# Altium PCB flight_controller.PcbDoc (part 1 of 2)
Units mm, origin at the board's own origin, x right, y up, seen from the top; angles counter-clockwise.
Board outline 36.5 x 36.5 mm, 4 copper layers (Top Layer, GND, Power, Bottom Layer), stack 0.568 mm thick; 81 components, 78 nets, 350 pads, 113 vias.
Unrouted connection lines stored in the file: 37.
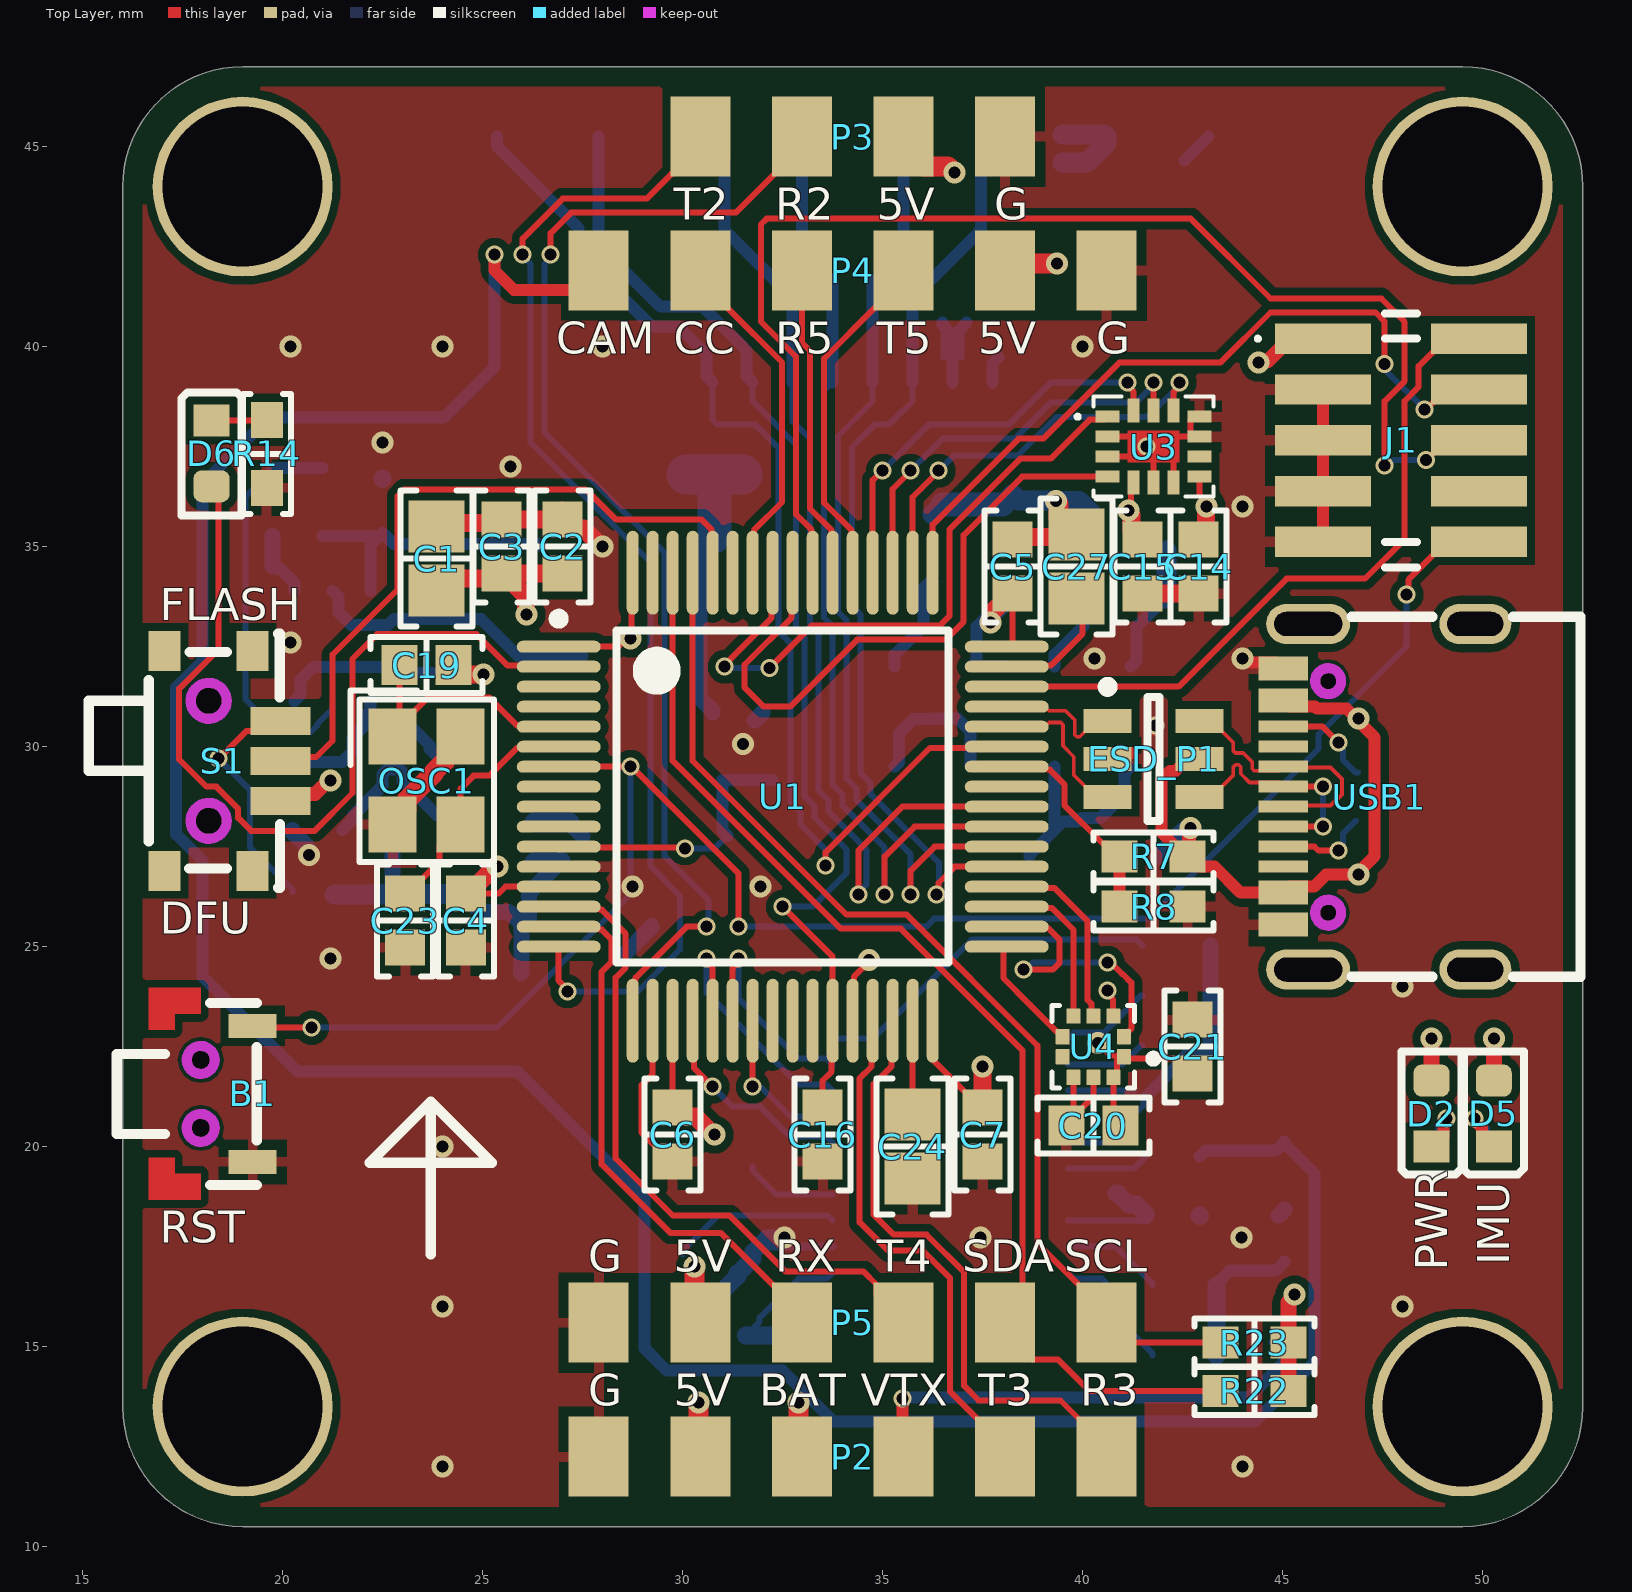
[diagram p0: Top Layer view]
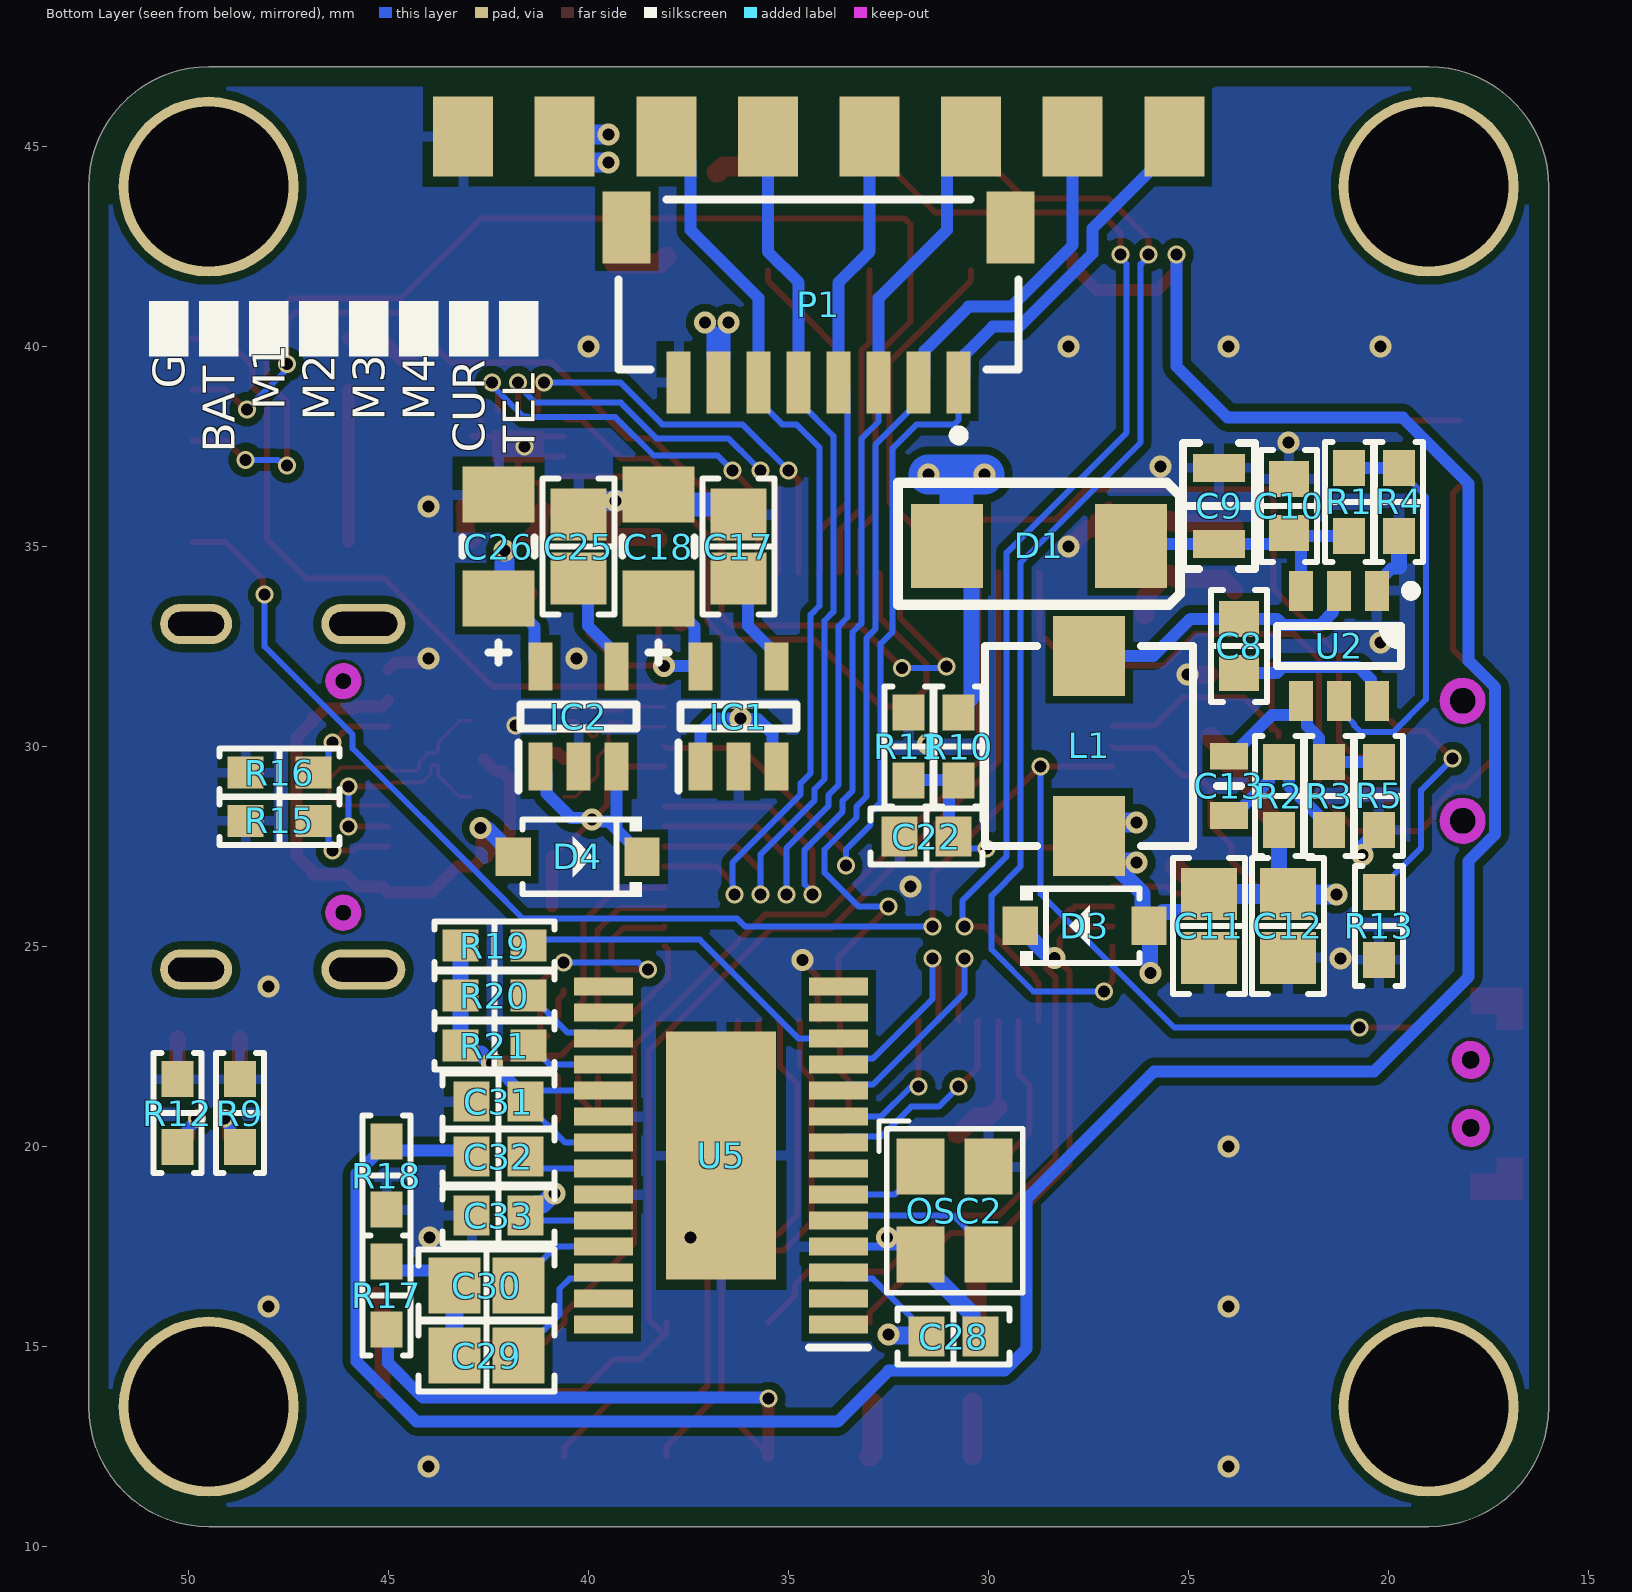
[diagram p1: Bottom Layer view, seen from below]
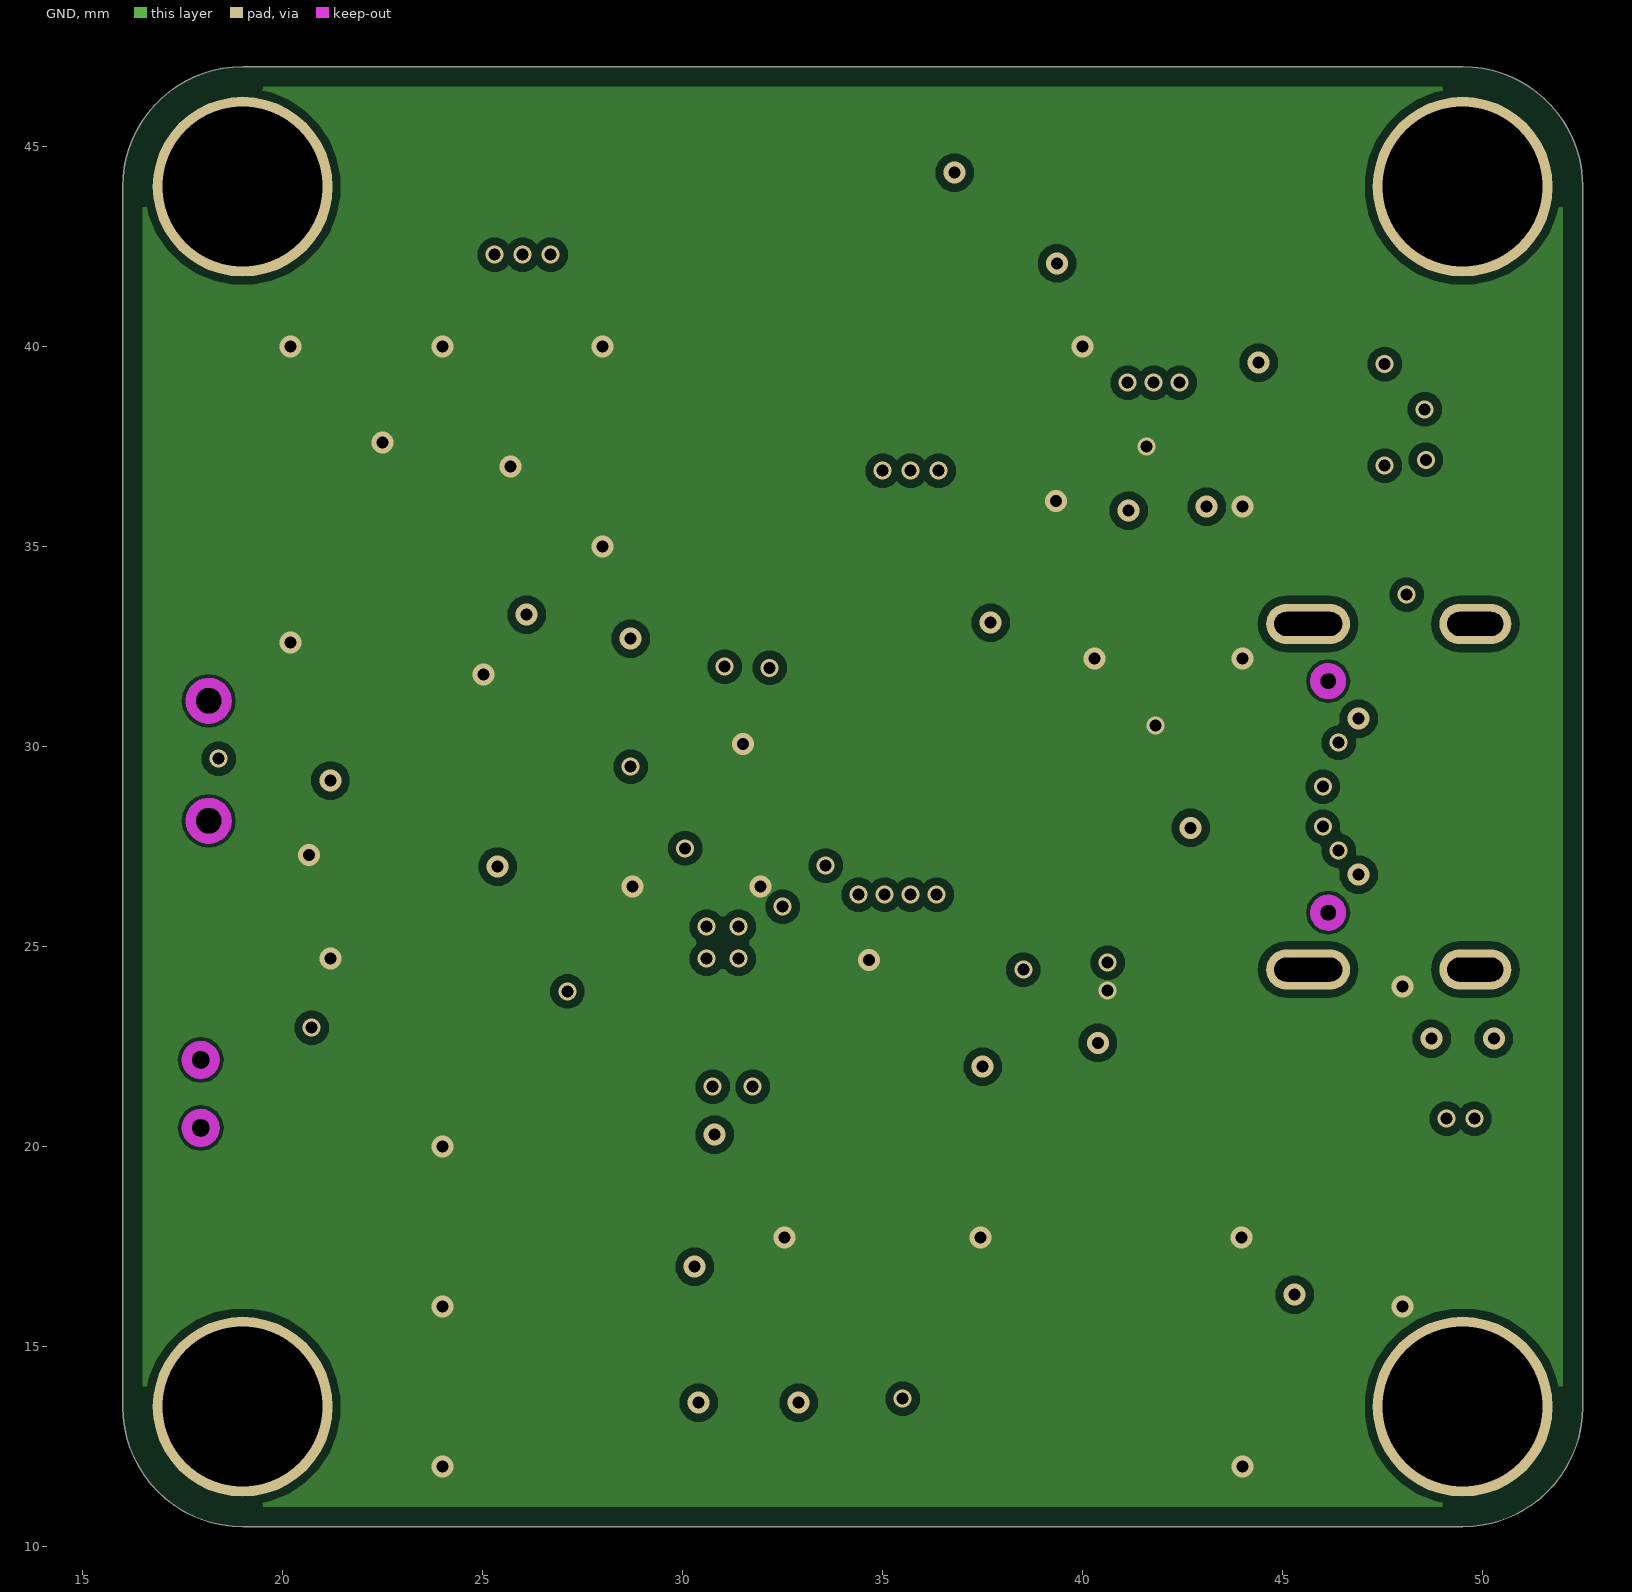
[diagram p2: GND]
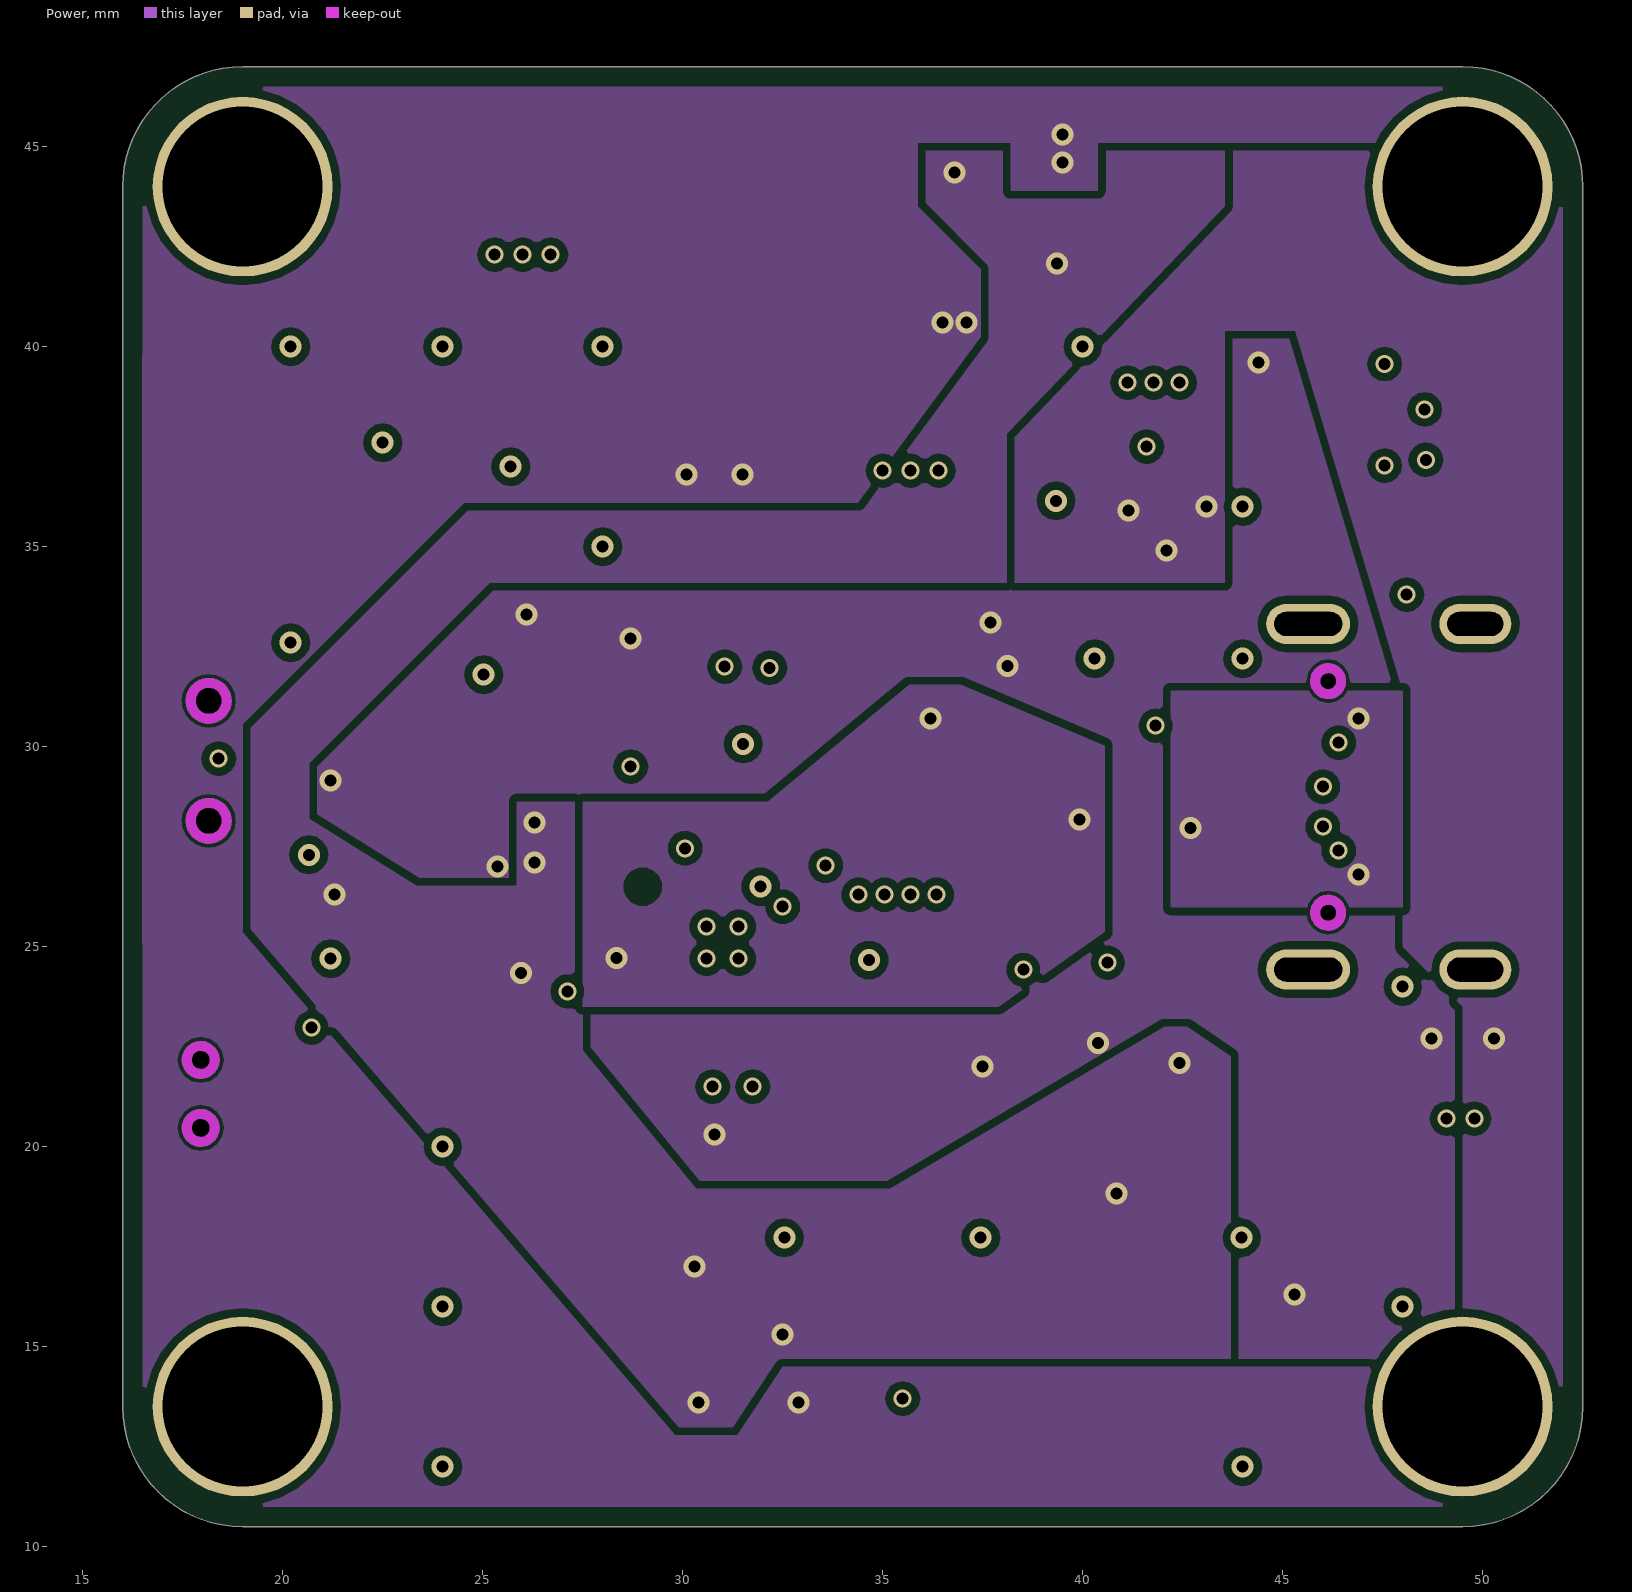
[diagram p3: Power]
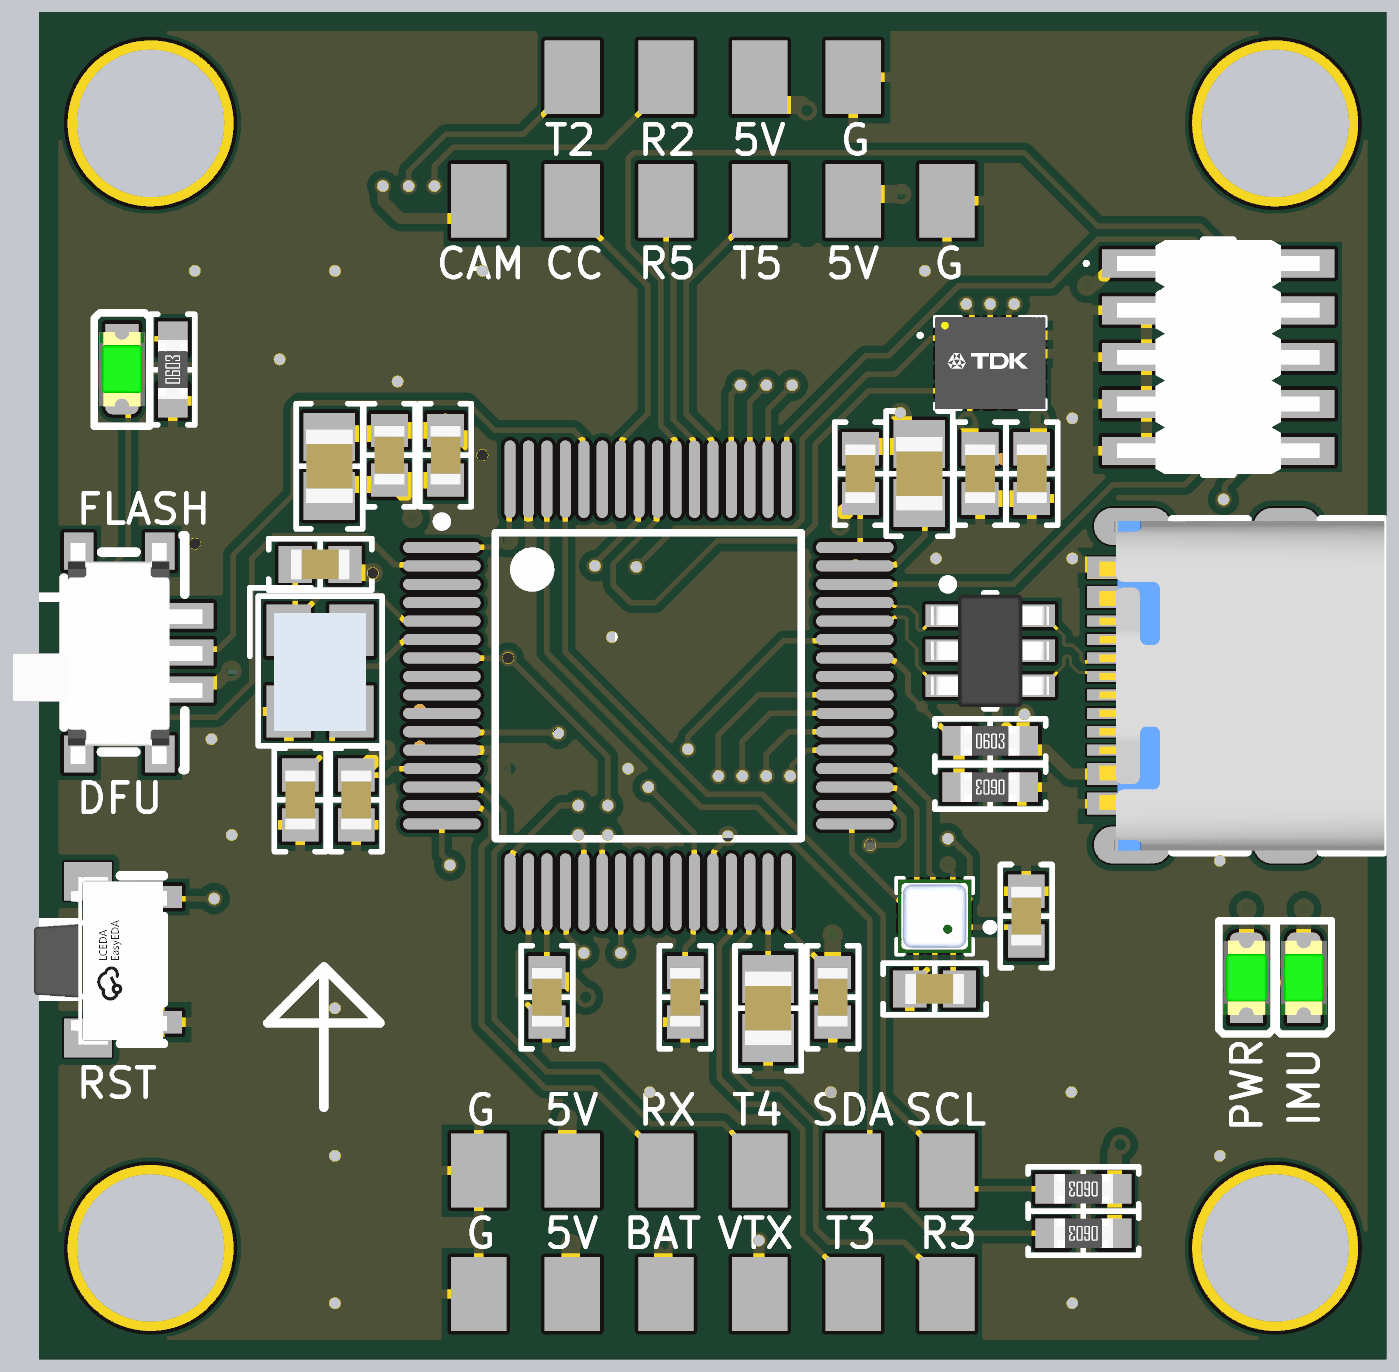
[diagram p5: 3D render of the assembled board from above, using the file's embedded part models]
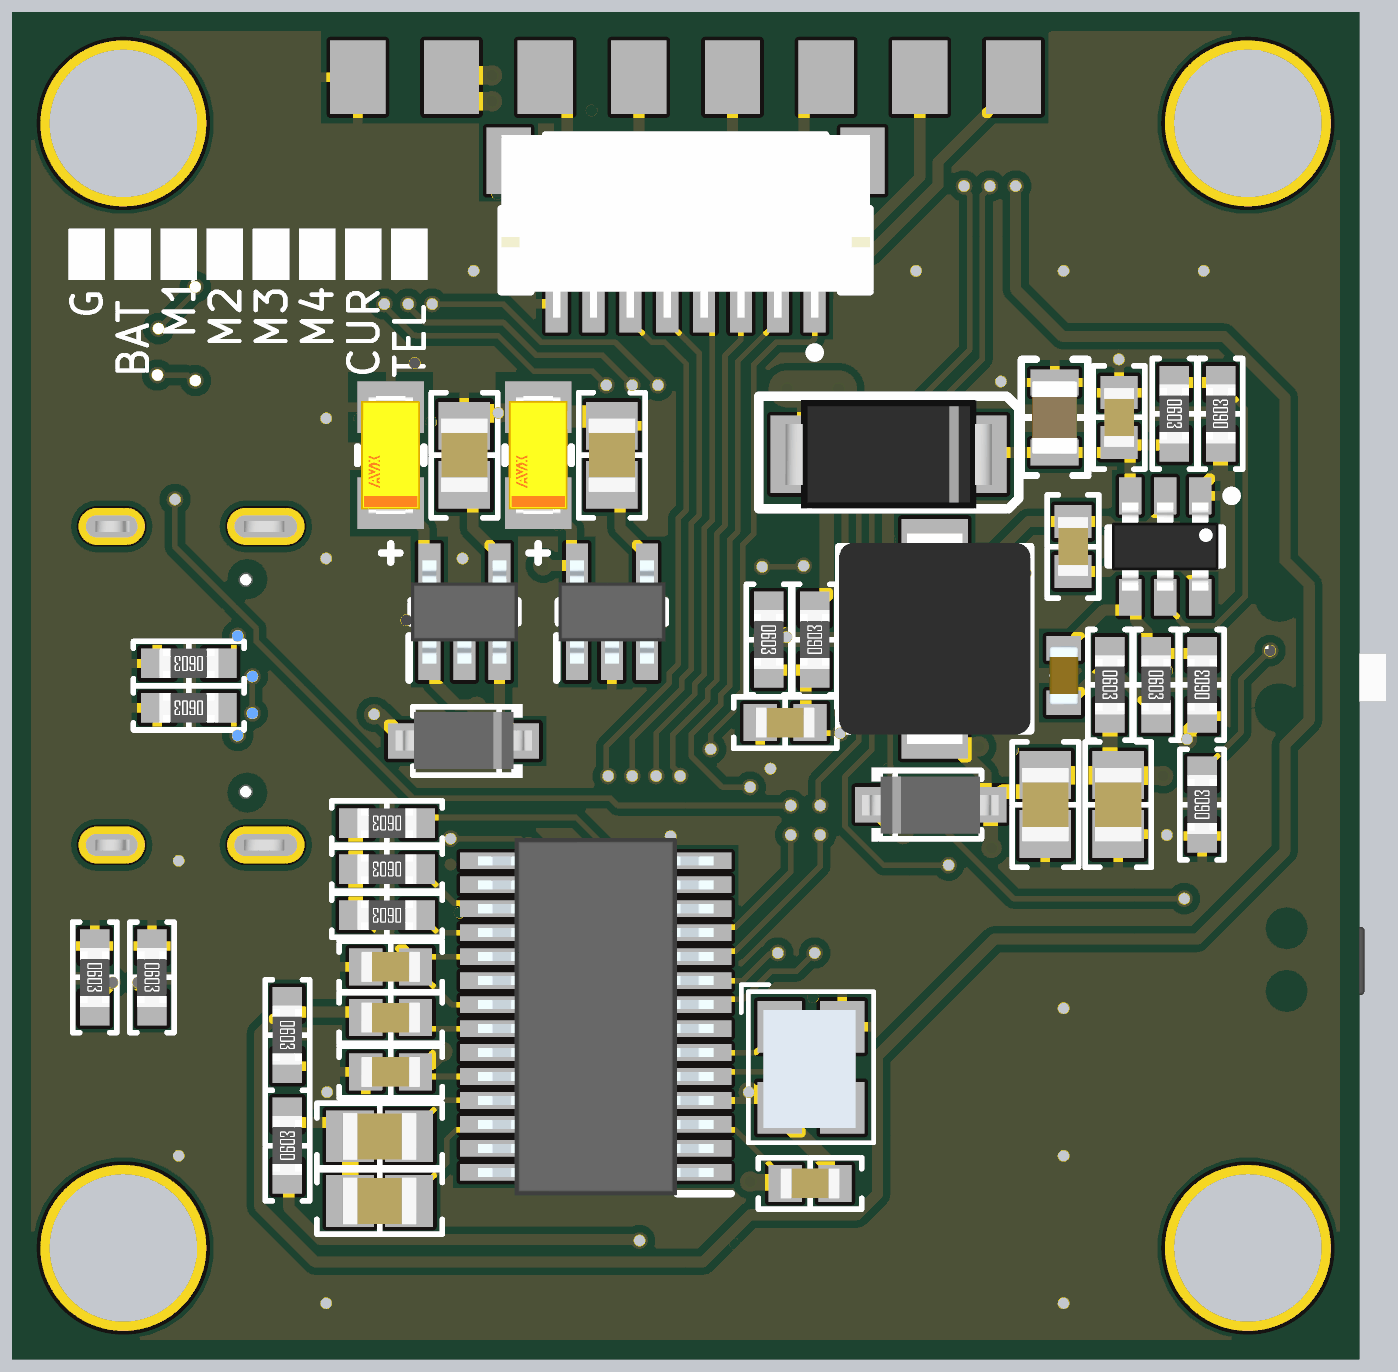
[diagram p6: 3D render of the assembled board from below, using the file's embedded part models]

## Layer stack, top to bottom
Top Solder: solder mask 0.0102, Solder Resist, Dk 3.5
Top Layer: signal copper 0.0356
Dielectric 2: prepreg 0.0711, PP-006, Dk 4.1
GND: signal copper 0.0175
Dielectric 1: prepreg 0.32, FR-4, Dk 4.8
Power: signal copper 0.0175
Dielectric 3: prepreg 0.0711, PP-006, Dk 4.1
Bottom Layer: signal copper 0.0356
Bottom Solder: solder mask 0.0102, Solder Resist, Dk 3.5

## Board outline
16,13.5 16,44 cw(c19,44) 19,47 49.5,47 cw(c49.5,44) 52.5,44 52.5,13.5 cw(c49.5,13.5) 49.5,10.5 19,10.5 cw(c19,13.5)

## Design rules (kind name [scope] priority, off if disabled: settings)
Clearance [All] p1: gap=0.2 ignorepadtopadclearanceinfootprint=TRUE
DiffPairsRouting [All] p1: maxlimit=0.3 minlimit=0.2 mostfreqgap=0.254 toplayer_prefgap=0.2 toplayer_minwidth=0.09 toplayer_maxwidth=0.3 toplayer_prefwidth=0.15 midlayer1_prefgap=0.2 midlayer1_minwidth=0.09 midlayer1_maxwidth=0.3 midlayer1_prefwidth=0.15 midlayer2_mingap=0.254 midlayer2_maxgap=0.254 midlayer2_minwidth=0.102 midlayer2_maxwidth=0.381 midlayer2_prefwidth=0.381 bottomlayer_prefgap=0.2 bottomlayer_minwidth=0.09 bottomlayer_maxwidth=0.3 bottomlayer_prefwidth=0.15 maxuncoupledlength=12.7
HoleSize [All] p1: absolutevalues=TRUE maxlimit=4 minlimit=0.025 maxpercent=80.000 minpercent=20.000
PolygonConnect [All] p1: thpad.connectstyle=Relief thpad.reliefconductorwidth=0.254 thpad.reliefentries=4 thpad.polygonreliefangle="90 Angle" thpad.airgapwidth=0.254 smdpad.connectstyle=Relief smdpad.reliefconductorwidth=0.254 smdpad.reliefentries=4 smdpad.polygonreliefangle="90 Angle" smdpad.airgapwidth=0.254 via.connectstyle=Direct via.reliefconductorwidth=0.254 via.reliefentries=4 via.polygonreliefangle="90 Angle" via.airgapwidth=0.254
RoutingVias [All] p1: holewidth=0.711 width=1.27 viastyle="Through Hole" minholewidth=0.2 minwidth=0.35 maxholewidth=0.711 maxwidth=1.27
SMDNeckDown [All] p1: percent=50.000
SolderMaskExpansion [All] p1: expansion=0.102 istentingtop=FALSE
SupplyNets "Schematic Supply Nets_6" [InNet('+5V')] p1: voltage=0.000
SupplyNets "Schematic Supply Nets_5" [InNet('+3V3')] p2: voltage=0.000
SupplyNets "Schematic Supply Nets_4" [InNet('+3V3_IMU')] p3: voltage=0.000
SupplyNets "Schematic Supply Nets_3" [InNet('+5V_USB')] p4: voltage=0.000
SupplyNets "Schematic Supply Nets_2" [InNet('+VBAT')] p5: voltage=0.000
SupplyNets "Schematic Supply Nets_1" [InNet('+5V_Reg')] p6: voltage=0.000
SupplyNets "Schematic Supply Nets" [InNet('GND')] p7: voltage=0.000
UnRoutedNet [All] p1: checkbadconnections=TRUE
Width [All] p1: maxlimit=1 minlimit=0.09 preferedwidth=0.254 toplayer_prefwidth=0.15 midlayer1_prefwidth=0.15 midlayer2_minwidth=0.102 midlayer2_maxwidth=0.254 bottomlayer_prefwidth=0.15 minimp=50.000000 maximp=50.000000 favimp=50.000000
27 further rules are at their usual default settings.

## Classes and differential pairs
differential pair USB_D: +USB_D_P -USB_D_N
differential pair USB_CON_D: +USB_CON_D_P -USB_CON_D_N

## Components (designator, comment, footprint, x,y, rotation, side; value= is the part's Value field where it differs from the comment)
B1 "Button" TS24CA 19.84,18.518 r90 top locked
C1 "4.7 µF" "CAP 0805_2012" 23.85,34.7 r270 top locked
C2 "0.1 µF" "CAP 0603_1608" 27,35 r270 top locked
C3 "0.1 µF" "CAP 0603_1608" 25.475,35 r270 top locked
C4 "0.1 µF" "CAP 0603_1608" 24.578,25.65 r90 top locked
C5 "0.1 µF" "CAP 0603_1608" 38.25,34.5 r270 top
C6 "0.1 µF" "CAP 0603_1608" 29.75,20.3 r90 top locked
C7 "0.1 µF" "CAP 0603_1608" 37.5,20.3 r90 top locked
C8 "0.1 µF" "CAP 0603_1608" 23.743,32.524 r90 bottom locked
C9 "10 µF" "MURATA GRM21B 0805_2012" 24.243,36.024 r270 bottom locked
C10 "0.1 µF" "CAP 0603_1608" 22.493,36.024 r90 bottom locked
C11 "22 µF" "CAP 0805_2012" 24.493,25.524 r90 bottom locked
C12 "22 µF" "CAP 0805_2012" 22.518,25.524 r90 bottom locked
C13 "75p" CAPC1608X90N 23.993,29.024 r270 bottom
C14 "0.1 µF" "CAP 0603_1608" 42.9,34.5 r270 top locked
C15 "0.1 µF" "CAP 0603_1608" 41.5,34.5 r270 top locked
C16 "0.1 µF" "CAP 0603_1608" 33.5,20.3 r90 top locked
C17 "10 µF" "CAP 0805_2012" 36.25,35 r270 bottom locked value="470 pF"
C18 "2.2uF" FP-TAJA-MFG 38.25,35 r270 bottom locked
C19 "0.1 µF" "CAP 0603_1608" 23.6,32.04 r180 top locked
C20 "0.1 µF" "CAP 0603_1608" 40.265,20.525 r180 top locked
C21 "0.1 µF" "CAP 0603_1608" 42.75,22.5 r90 top locked
C22 "0.1 µF" "CAP 0603_1608" 31.55,27.75 r180 bottom locked
C23 "0.1 µF" "CAP 0603_1608" 23.06,25.65 r90 top locked
C24 "2.2 µF" "CAP 0805_2012" 35.75,20 r90 top locked
C25 "10 µF" "CAP 0805_2012" 40.25,35 r270 bottom locked value="470 pF"
C26 "2.2uF" FP-TAJA-MFG 42.25,35 r270 bottom locked
C27 "2.2 µF" "CAP 0805_2012" 39.85,34.5 r270 top locked
C28 "0.1 µF" "CAP 0603_1608" 30.875,15.25 r0 bottom locked
C29 "22 µF" "CAP 0805_2012" 42.55,14.775 r180 bottom locked
C30 "22 µF" "CAP 0805_2012" 42.55,16.525 r180 bottom locked
C31 "0.1 µF" "CAP 0603_1608" 42.25,21.125 r0 bottom locked
C32 "0.1 µF" "CAP 0603_1608" 42.25,19.75 r0 bottom locked
C33 "0.1 µF" "CAP 0603_1608" 42.25,18.275 r0 bottom locked
D1 "SS34" FP_SMA 28.743,35.024 r180 bottom locked
D2 "LED" FP_0805_LED_GREEN 48.723,20.828 r270 top locked
D3 "B5819W_C7420330" SOD-123 25.147,26.476 r0 bottom locked
D4 "B5819W_C7420330" SOD-123 42.732,26.298 r180 bottom locked
D5 "LED" FP_0805_LED_GREEN 50.277,20.828 r270 top
D6 "LED" FP_0805_LED_GREEN 18.223,37.336 r90 top locked
ESD_P1 "USBLC6-2SC6" STM-SOT23-6L_V 41.773,29.698 r0 top
IC1 "MIC5219-3.3YM5-TR" SOT95P280X145-5N 36.25,30.75 r90 bottom locked
IC2 "MIC5219-3.3YM5-TR" SOT95P280X145-5N 40.25,30.75 r90 bottom locked
J1 "20021121-00010C4LF" 2002112100010C4LF 47.958,37.66 r270 top locked
L1 "10µ" "BOURNS SRP5030T" 27.493,30.024 r270 bottom locked value="10 µH"
OSC1 "8MHz" CRYSTAL-SMD_4P-L3.2-W2.5-BL 21.439,31.915 r270 top locked
OSC2 "27MHz" X322527MSB4SI 30,19.5 r270 bottom locked
P1 "SM08B-SRSS-TB(LF)(SN)" JST-SM08B-SRSS-TB_V 34.25,41.56 r0 bottom locked
P2 "Connector" PAD_6 41.489,10.421 r90 top locked
P3 "Connector" PAD_4 29.449,46.858 r270 top locked
P4 "Connector" PAD_6 27.011,43.729 r270 top locked
P5 "Connector" PAD_6 41.489,13.771 r90 top locked
R1 "511k" "YAGEO RES 0603_1608" 20.993,36.124 r270 bottom locked
R2 "49R9" "YAGEO RES 0603_1608" 22.743,28.774 r270 bottom
R3 "100k" "YAGEO RES 0603_1608" 21.493,28.774 r270 bottom locked
R4 "105k" "YAGEO RES 0603_1608" 19.743,36.124 r90 bottom locked
R5 "13k3" "YAGEO RES 0603_1608" 20.243,28.774 r90 bottom locked
R7 "33k" "YAGEO RES 0603_1608" 41.773,27.25 r0 top locked
R8 "82k" "YAGEO RES 0603_1608" 41.773,26 r180 top locked
R9 "1k" "YAGEO RES 0603_1608" 48.723,20.84 r270 bottom
R10 "33k" "YAGEO RES 0603_1608" 30.75,30 r90 bottom locked value=100k
R11 "6.8k" "YAGEO RES 0603_1608" 32,30 r270 bottom locked value=10k
R12 "1k" "YAGEO RES 0603_1608" 50.277,20.84 r270 bottom
R13 "6.8k" "YAGEO RES 0603_1608" 20.243,25.524 r90 bottom locked value=10k
R14 "1k" "YAGEO RES 0603_1608" 19.602,37.324 r90 top
R15 "5k1" "YAGEO RES 0603_1608" 47.726,28.148 r0 bottom locked
R16 "5k1" "YAGEO RES 0603_1608" 47.726,29.352 r0 bottom locked
R17 "75R" "YAGEO RES 0603_1608" 45.05,16.275 r90 bottom locked
R18 "75R" "YAGEO RES 0603_1608" 45.05,19.275 r270 bottom locked
R19 "1k" "YAGEO RES 0603_1608" 42.35,25.025 r0 bottom locked
R20 "1k" "YAGEO RES 0603_1608" 42.35,23.775 r0 bottom locked
R21 "1k" "YAGEO RES 0603_1608" 42.35,22.525 r0 bottom locked
R22 "5k1" "YAGEO RES 0603_1608" 44.3,13.898 r180 top locked
R23 "5k1" "YAGEO RES 0603_1608" 44.3,15.102 r180 top locked
S1 "MINI MSK12CO2" SW-SMD_MSK12CO2 14.896,33.152 r270 top locked
U1 "STM32F405RGT6" STM-LQFP64_M 32.5,28.75 r0 top locked
U2 "TPS54302DDCT" "TI SOT-23-6 DDC" 21.243,32.524 r270 bottom locked
U3 "ICM-42688-P" IIM42352 41.773,37.5 r0 top locked
U4 "BMP388" PQFN50P200X200X80-10N 41.408,23.643 r180 top locked
U5 "AT7456E" SOP65P640X120-29N 36.688,19.775 r0 bottom locked
USB1 "GT-USB-7010ASV" USB-C-SMD_G-SWITCH_GT-USB-7010ASV 45.636,24.43 r90 top locked

## Footprints (in the part's own frame and the unit in brackets; to place one, negate y for a bottom-side part, rotate by r counter-clockwise, add the part's x,y. Pads: shape width x height; smd on the part's side, far side on the other; paste and mask are expansions set on the pad)
2002112100010C4LF [mm]
  rect 0.76x2.4 smd: 1(-2.54,-1.95) 2(-2.54,1.95) 3(-1.27,-1.95) 4(-1.27,1.95) 5(0,-1.95) 6(0,1.95) 7(1.27,-1.95) 8(1.27,1.95) 9(2.54,-1.95) 10(2.54,1.95)
  silkscreen extent -3.17,-3.63 3.17,0.4, body extent -3.18,-2.75 3.18,2.75, height 4.5
"BOURNS SRP5030T" [mm] "Precision Wire Wound Inductor, 2-Leads, Body 5.70x5.20mm, IPC Medium Density"
  rect 2x1.8 smd: 1(-2.25,0) 2(2.25,0)
  silkscreen extent -2.5,-2.6 2.5,2.6, body extent -2.85,-2.6 2.85,2.6, height 3
"CAP 0603_1608" [mm] "Chip Capacitor, 2-Leads, Body 1.60x0.80mm, IPC Medium Density"
  rect 0.9x1 smd: 1(-0.675,0) 2(0.675,0)
  silkscreen extent -1.4,-0.7 1.4,0.7, body extent -0.8,-0.41 0.8,0.41, height 0.82
"CAP 0805_2012" [mm] "Chip Capacitor, 2-Leads, Body 2.00x1.20mm, IPC Medium Density"
  rect 1.3x1.4 smd: 1(-0.8,0) 2(0.8,0)
  silkscreen extent -1.7,-0.9 1.7,0.9, body extent -1,-0.64 1,0.64, height 1.26
CAPC1608X90N [mm]
  rect 0.67x0.94 smd: 1(-0.74,0) 2(0.74,0)
  silkscreen extent 0,-0.3 0,0.3, body extent -0.8,-0.4 0.8,0.4, height 0.9
CRYSTAL-SMD_4P-L3.2-W2.5-BL [mm]
  rect 1.4x1.2 smd: 1(1.665,1.311) 2(3.865,1.311) 3(3.865,3.011) 4(1.665,3.011)
  silkscreen extent 0.51,0.25 4.79,3.84, body extent 1.19,0.91 4.39,3.41, height 0.79
FP-TAJA-MFG [mm]
  rect 1.4x1.8 smd paste+0 mask+0: 1(-1.3,0) 2(1.3,0)
  silkscreen extent -0.22,-0.9 2.9,0.9, body extent -1.6,-0.8 1.6,0.8, height 1.8
FP_0805_LED_GREEN [mm] "0805 méretű zöld LED"
  rrect50% 0.8x0.9 smd: A(-0.825,0)
  rect 0.8x0.9 smd: K(0.825,0)
  silkscreen extent -1.55,-0.75 1.52,0.75, body extent -1.01,-0.63 1.01,0.63, height 1.1
FP_SMA [mm] "SMA footprint"
  rect 1.8x2.1 smd: 1(-2.3,0) 2(2.3,0)
  silkscreen extent -3.53,-1.47 3.53,1.58, body extent -2.8,-1.47 2.8,1.48, height 2.7
IIM42352 [mm]
  rect 0.6x0.3 smd: 1(-1.15,0.75) 2(-1.15,0.25) 3(-1.15,-0.25) 4(-1.15,-0.75) 8(1.15,-0.75) 9(1.15,-0.25) 10(1.15,0.25) 11(1.15,0.75)
  rect 0.3x0.6 smd: 5(-0.5,-0.9) 6(0,-0.9) 7(0.5,-0.9) 12(0.5,0.9) 13(0,0.9) 14(-0.5,0.9)
  silkscreen extent -1.95,-1.25 1.5,1.25, body extent -1.5,-1.25 1.5,1.25, height 0.9
JST-SM08B-SRSS-TB_V [mm] "SMD, 8-Leads, Body 10x4.25mm, Pitch 1mm"
  rect 0.6x1.55 smd: 1(-3.5,2.45) 2(-2.5,2.45) 3(-1.5,2.45) 4(-0.5,2.45) 5(0.5,2.45) 6(1.5,2.45) 7(2.5,2.45) 8(3.5,2.45)
  rect 1.2x1.8 smd: MP1(-4.8,-1.425) MP2(4.8,-1.425)
  silkscreen extent -5,-2.12 5,3.9, body extent -5,-2.12 5,2.83, height 2.96
"MURATA GRM21B 0805_2012" [mm] "Chip Capacitor, 2-Leads, Body 2.00x1.25mm"
  rect 0.7x1.3 smd: 1(-0.95,0) 2(0.95,0)
  silkscreen extent -1.58,-0.9 1.58,0.9, body extent -1,-0.63 1,0.63, height 1.25
PAD_4 [mm]
  rect 2x1.5 smd: 1(1.608,0.991) 2(1.608,3.531) 3(1.608,6.071) 4(1.608,8.611)
PAD_6 [mm]
  rect 2x1.5 smd: 1(1.829,0.889) 2(1.829,3.429) 3(1.829,5.969) 4(1.829,8.509) 5(1.829,11.049) 6(1.829,13.589)
PQFN50P200X200X80-10N [mm]
  rrect9% 0.35x0.38 smd: 1(0.378,1.393) 2(0.378,0.893) 3(0.643,0.378) 4(1.143,0.378) 5(1.643,0.378) 6(1.908,0.893) 7(1.908,1.393) 8(1.643,1.908) 9(1.143,1.908) 10(0.643,1.908)
  silkscreen extent -0.46,0.11 2.17,2.17, body extent 0.14,0.14 2.14,2.14, height 0.8
SOD-123 [mm]
  rect 0.88x0.96 smd: 1(0.846,0.952) 2(4.067,0.952)
  silkscreen extent 1.08,-0.05 4.06,1.95, body extent 0.61,0.19 4.31,1.74, height 1.2
SOP65P640X120-29N [mm]
  rect 1.475x0.45 smd: 1(-2.938,4.225) 2(-2.938,3.575) 3(-2.938,2.925) 4(-2.938,2.275) 5(-2.938,1.625) 6(-2.938,0.975) 7(-2.938,0.325) 8(-2.938,-0.325) 9(-2.938,-0.975) 10(-2.938,-1.625) 11(-2.938,-2.275) 12(-2.938,-2.925) 13(-2.938,-3.575) 14(-2.938,-4.225) 15(2.938,-4.225) 16(2.938,-3.575) 17(2.938,-2.925) 18(2.938,-2.275) 19(2.938,-1.625) 20(2.938,-0.975) 21(2.938,-0.325) 22(2.938,0.325) 23(2.938,0.975) 24(2.938,1.625) 25(2.938,2.275) 26(2.938,2.925) 27(2.938,3.575) 28(2.938,4.225)
  rect 2.75x6.2 smd: 29(0,0)
  silkscreen extent -3.68,4.8 -2.2,4.8, body extent -3.2,-4.85 3.2,4.85, height 1.2
SOT95P280X145-5N [mm]
  rect 1.2x0.6 smd: 1(-1.25,0.95) 2(-1.25,0) 3(-1.25,-0.95) 4(1.25,-0.95) 5(1.25,0.95)
  silkscreen extent -1.85,-1.45 0.3,1.5, body extent -1.4,-1.45 1.4,1.45, height 1.45
STM-LQFP64_M [mm] "Thin QFP, 64-Leads, Body 10x10mm, Pitch 0.5mm, IPC Low Density"
  oval 2.1x0.3 smd: 1(-5.6,3.75) 2(-5.6,3.25) 3(-5.6,2.75) 4(-5.6,2.25) 5(-5.6,1.75) 6(-5.6,1.25) 7(-5.6,0.75) 8(-5.6,0.25) 9(-5.6,-0.25) 10(-5.6,-0.75) 11(-5.6,-1.25) 12(-5.6,-1.75) 13(-5.6,-2.25) 14(-5.6,-2.75) 15(-5.6,-3.25) 16(-5.6,-3.75) 33(5.6,-3.75) 34(5.6,-3.25) 35(5.6,-2.75) 36(5.6,-2.25) 37(5.6,-1.75) 38(5.6,-1.25) 39(5.6,-0.75) 40(5.6,-0.25) 41(5.6,0.25) 42(5.6,0.75) 43(5.6,1.25) 44(5.6,1.75) 45(5.6,2.25) 46(5.6,2.75) 47(5.6,3.25) 48(5.6,3.75)
  oval 0.3x2.1 smd: 17(-3.75,-5.6) 18(-3.25,-5.6) 19(-2.75,-5.6) 20(-2.25,-5.6) 21(-1.75,-5.6) 22(-1.25,-5.6) 23(-0.75,-5.6) 24(-0.25,-5.6) 25(0.25,-5.6) 26(0.75,-5.6) 27(1.25,-5.6) 28(1.75,-5.6) 29(2.25,-5.6) 30(2.75,-5.6) 31(3.25,-5.6) 32(3.75,-5.6) 49(3.75,5.6) 50(3.25,5.6) 51(2.75,5.6) 52(2.25,5.6) 53(1.75,5.6) 54(1.25,5.6) 55(0.75,5.6) 56(0.25,5.6) 57(-0.25,5.6) 58(-0.75,5.6) 59(-1.25,5.6) 60(-1.75,5.6) 61(-2.25,5.6) 62(-2.75,5.6) 63(-3.25,5.6) 64(-3.75,5.6)
  silkscreen extent -5.72,-4.15 4.15,4.57, body extent -5,-5 5,5, height 1.6
STM-SOT23-6L_V [mm] "SOT23, 6-Leads, Body 3.05x1.75mm, Pitch 0.95mm"
  rect 1.2x0.6 smd: 1(-1.15,0.95) 2(-1.15,0) 3(-1.15,-0.95) 4(1.15,-0.95) 5(1.15,0) 6(1.15,0.95)
  silkscreen extent -1.27,-1.55 0.15,1.92, body extent -1.6,-1.53 1.6,1.53, height 1.45
SW-SMD_MSK12CO2 [mm]
  rect 0.7x1.5 smd: 1(2.504,5.054) 2(3.504,5.054) 3(4.504,5.054)
  rect 1x0.8 smd: 4(0.754,4.354) 4(0.754,2.154) 5(6.254,2.154) 5(6.254,4.354)
  Keep-Out Layer board cut-out: 5.454,3.254 5.392,3.477 5.228,3.64 5.004,3.699 4.781,3.64 4.616,3.477 4.554,3.254 4.554,3.254 4.616,3.031 4.781,2.868 5.004,2.809 5.228,2.868 5.392,3.031 5.454,3.254
  Keep-Out Layer board cut-out: 2.454,3.254 2.392,3.477 2.228,3.64 2.004,3.699 1.781,3.64 1.616,3.477 1.554,3.254 1.554,3.254 1.616,3.031 1.781,2.868 2.004,2.809 2.228,2.868 2.392,3.031 2.454,3.254
  Keep-Out Layer circle w0.254: c5.004,3.254 r0.45
  Keep-Out Layer circle w0.025: c5.004,3.254 r0.45
  Keep-Out Layer circle w0.254: c2.004,3.254 r0.45
  Keep-Out Layer circle w0.025: c2.004,3.254 r0.45
  silkscreen extent 0.33,0.25 6.68,5.03, body extent 0.53,0.36 6.53,5.51, height 1.4
"TI SOT-23-6 DDC" [mm] "SOT23, 6-Leads, Body 2.90x2.80mm, Pitch 0.95mm, IPC Medium Density"
  rect 1x0.6 smd: 1(-1.375,0.95) 2(-1.375,0) 3(-1.375,-0.95) 4(1.375,-0.95) 5(1.375,0) 6(1.375,0.95)
  silkscreen extent -1.5,-1.55 0.5,1.92, body extent -1.19,-1.45 1.19,1.45, height 1
TS24CA [mm]
  rect 0.6x1.2 smd: 1(1.103,0.59) 2(4.503,0.59)
  Top Layer region: 5.453,1.89 4.803,1.89 4.803,2.54 4.403,2.54 4.403,3.19 5.453,3.19
  Top Layer region: 1.203,2.54 0.803,2.54 0.803,1.89 0.153,1.89 0.153,3.19 1.203,3.19
  Keep-Out Layer board cut-out: 2.303,1.89 2.254,2.063 2.126,2.19 1.953,2.236 1.779,2.19 1.651,2.063 1.603,1.89 1.603,1.89 1.651,1.717 1.779,1.59 1.953,1.544 2.126,1.59 2.254,1.717 2.303,1.89
  Keep-Out Layer board cut-out: 4.003,1.89 3.954,2.063 3.826,2.19 3.653,2.236 3.479,2.19 3.351,2.063 3.303,1.89 3.303,1.89 3.351,1.717 3.479,1.59 3.653,1.544 3.826,1.59 3.954,1.717 4.003,1.89
  Keep-Out Layer circle w0.025: c1.953,1.89 r0.35
  Keep-Out Layer circle w0.254: c1.953,1.89 r0.35
  Keep-Out Layer circle w0.025: c3.653,1.89 r0.35
  Keep-Out Layer circle w0.254: c3.653,1.89 r0.35
  silkscreen extent 0.53,0.49 5.08,3.99, body extent 0.49,0.4 5.04,4, height 1.87
USB-C-SMD_G-SWITCH_GT-USB-7010ASV [mm]
  oval 1x2.1 hole 0.6 slot 1.7 at 90 deg paste-2539.97 mask+0.05: 1(0,0) 2(8.64,0)
  oval 1x1.8 hole 0.6 slot 1.4 at 90 deg paste-2539.97 mask+0.05: 3(8.64,-4.18) 4(0,-4.18)
  rect 0.6x1.24 smd paste-100 mask+0.05: A1B12(1.12,0.62) A4B9(1.92,0.62) B1A12(7.52,0.62) B4A9(6.72,0.62)
  rect 0.3x1.24 smd paste-100 mask+0.05: A5(3.07,0.62) A6(4.07,0.62) A7(4.57,0.62) A8(5.57,0.62) B5(6.07,0.62) B6(5.07,0.62) B7(3.57,0.62) B8(2.57,0.62)
  Keep-Out Layer board cut-out: 1.745,-0.5 1.701,-0.338 1.582,-0.22 1.42,-0.177 1.258,-0.22 1.139,-0.338 1.095,-0.5 1.095,-0.5 1.139,-0.662 1.258,-0.78 1.42,-0.823 1.582,-0.78 1.701,-0.662 1.745,-0.5
  Keep-Out Layer board cut-out: 7.535,-0.5 7.491,-0.338 7.372,-0.22 7.21,-0.177 7.048,-0.22 6.929,-0.338 6.885,-0.5 6.885,-0.5 6.929,-0.662 7.048,-0.78 7.21,-0.823 7.372,-0.78 7.491,-0.662 7.535,-0.5
  Keep-Out Layer circle w0.254: c1.42,-0.5 r0.325
  Keep-Out Layer circle w0.025: c1.42,-0.5 r0.325
  Keep-Out Layer circle w0.254: c7.21,-0.5 r0.325
  Keep-Out Layer circle w0.025: c7.21,-0.5 r0.325
  silkscreen extent -0.18,-6.81 8.82,-1.09, body extent -0.15,-6.82 8.79,0.91, height 3.29
X322527MSB4SI [mm]
  rect 1.4x1.2 smd: 1(0,-1.7) 2(2.2,-1.7) 3(2.2,0) 4(0,0)
  silkscreen extent -1.14,-2.74 3.15,0.85, body extent -0.46,-2.14 2.74,0.36, height 0.76
"YAGEO RES 0603_1608" [mm] "Chip Resistor, 2-Leads, Body 1.60x0.80mm"
  rect 0.9x0.8 smd: 1(-0.85,0) 2(0.85,0)
  silkscreen extent -1.5,-0.6 1.5,0.6, body extent -0.8,-0.4 0.8,0.4, height 0.45

## Part data
B1: library part "Button 2P", "Push button"
C1: library part CL21A475KAQNNNE, "CAP CER 4.7UF 25V X5R 0805", Device Package="0805 (2012 Metric)", manufacturer="Samsung Electro-Mechanics", Operating Temperature="-55°C ~ 85°C", Supplier Part Number 1=1276-1244-1-ND, Temperature Coefficient=X5R, Tolerance=±10%, Voltage - Rated=25V, Applications="General Purpose", Capacitance="4.7 µF", componentlink1description=Datasheet, componentlink1url=http://www.samsungsem.com/kr/support/product-search/mlcc/CL21A475KAQNNNE.jsp, componentlink2description="DigiKey Link", componentlink2url=https://www.digikey.com/en/products/detail/samsung-electro-mechanics/CL21A475KAQNNNE/3886902, lastupdated="09/02/2024 20:15:37", Lifecycle Status=Active, Minimum Order=1, Mounting Type="Surface Mount, MLCC", Package / Case="0805 (2012 Metric)", packaging=TapeAndReel, Part Number=CL21A475KAQNNNE, Part Status=Active, partid=14321, price=0.01, series=CL, Size / Dimension="0.079\" L x 0.049\" W (2.00mm x 1.25mm)", Supplier 1=DigiKey, Thickness (Max)="0.055\" (1.40mm)"
C2 C3 C4 C5 C6 C7 C8 C10 C14 C15 C16 C20 C21 C22 C28 C31 C32 C33: library part CL10B104KB8NNNC, "CAP CER 0.1UF 50V X7R 0603", Capacitance=100n, Device Package="0603 (1608 Metric)", manufacturer="Samsung Electro-Mechanics", Operating Temperature="-55°C ~ 125°C", Supplier Part Number 1=1276-1000-1-ND, Temperature Coefficient=X7R, Tolerance=±10%, Voltage - Rated=50V, Applications="General Purpose", componentlink1description=Datasheet, componentlink1url=http://www.samsungsem.com/kr/support/product-search/mlcc/CL10B104KB8NNNC.jsp, componentlink2description="DigiKey Link", componentlink2url=https://www.digikey.com/en/products/detail/samsung-electro-mechanics/CL10B104KB8NNNC/3886658, lastupdated="09/02/2024 20:10:20", Lifecycle Status=Active, Minimum Order=1, Mounting Type="Surface Mount, MLCC", Package / Case="0603 (1608 Metric)", packaging=TapeAndReel, Part Number=CL10B104KB8NNNC, Part Status=Active, partid=9788, price=0.01, series=CL, Size / Dimension="0.063\" L x 0.031\" W (1.60mm x 0.80mm)", Supplier 1=DigiKey, Thickness (Max)="0.035\" (0.90mm)"
C9: library part GRM21BR61H106KE43L, "CAP CER 10UF 50V X5R 0805", Capacitance=10µ, Device Package="0805 (2012 Metric)", manufacturer="Murata Electronics", Operating Temperature="-55°C ~ 85°C", Supplier Part Number 1=490-18663-1-ND, Temperature Coefficient=X5R, Tolerance=±10%, Voltage - Rated=50V, Applications="Mobile Devices Only", componentlink1description=Datasheet, componentlink1url=https://search.murata.co.jp/Ceramy/image/img/A01X/G101/ENG/GRM21BR61H106KE43-01A.pdf, componentlink2description="DigiKey Link", componentlink2url=https://www.digikey.com/en/products/detail/murata-electronics/GRM21BR61H106KE43L/10326316, lastupdated="27/08/2024 09:29:56", Lifecycle Status=Active, Minimum Order=1, Mounting Type="Surface Mount, MLCC", Package / Case="0805 (2012 Metric)", packaging=TapeAndReel, Part Number=GRM21BR61H106KE43L, Part Status=Active, partid=39284, price=0.05, series=GRM, Size / Dimension="0.079\" L x 0.049\" W (2.00mm x 1.25mm)", Supplier 1=DigiKey, Thickness (Max)="0.057\" (1.45mm)"
C11 C12 C29 C30: library part CL21A226KOQNNNE, "CAP CER 22UF 16V X5R 0805", Capacitance=22µ, Device Package="0805 (2012 Metric)", manufacturer="Samsung Electro-Mechanics", Operating Temperature="-55°C ~ 85°C", Supplier Part Number 1=1276-6526-1-ND, Temperature Coefficient=X5R, Tolerance=±10%, Voltage - Rated=16V, Applications="General Purpose", componentlink1description=Datasheet, componentlink1url=http://www.samsungsem.com/kr/support/library/product-catalog/mlcc.jsp, componentlink2description="DigiKey Link", componentlink2url=https://www.digikey.com/en/products/detail/samsung-electro-mechanics/CL21A226KOQNNNE/5961010, lastupdated="09/02/2024 20:16:07", Lifecycle Status=Active, Minimum Order=1, Mounting Type="Surface Mount, MLCC", Package / Case="0805 (2012 Metric)", packaging=TapeAndReel, Part Number=CL21A226KOQNNNE, Part Status=Active, partid=3004, price=0.06, series=CL, Size / Dimension="0.079\" L x 0.049\" W (2.00mm x 1.25mm)", Supplier 1=DigiKey, Thickness (Max)="0.055\" (1.40mm)"
C13: library part 0603CG750J500NT, "Capacitor", Manufacturer_Name="FH(Guangdong Fenghua Advanced Tech)", Datasheet Link=https://datasheet.lcsc.com/lcsc/1811061811_FH--Guangdong-Fenghua-Advanced-Tech-0603CG750J500NT_C1681.pdf, Height=0.9mm, Manufacturer_Part_Number=0603CG750J500NT
C17 C25: library part CL10B471KB8NNNC, "CAP CER 470PF 50V X7R 0603", Capacitance="470 pF", Device Package="0603 (1608 Metric)", manufacturer="Samsung Electro-Mechanics", Operating Temperature="-55°C ~ 125°C", Supplier Part Number 1=1276-1094-1-ND, Temperature Coefficient=X7R, Tolerance=±10%, Voltage - Rated=50V, Applications="General Purpose", componentlink1description=Datasheet, componentlink1url=http://www.samsungsem.com/kr/support/product-search/mlcc/CL10B471KB8NNNC.jsp, componentlink2description="DigiKey Link", componentlink2url=https://www.digikey.com/en/products/detail/samsung-electro-mechanics/CL10B471KB8NNNC/3886752, lastupdated="09/02/2024 20:10:20", Lifecycle Status=Active, Minimum Order=1, Mounting Type="Surface Mount, MLCC", Package / Case="0603 (1608 Metric)", packaging=TapeAndReel, Part Number=CL10B471KB8NNNC, Part Status=Active, partid=9822, price=0.01, series=CL, Size / Dimension="0.063\" L x 0.031\" W (1.60mm x 0.80mm)", Supplier 1=DigiKey, Thickness (Max)="0.035\" (0.90mm)"
C18 C26: library part CMP-04424-000432-1, "TAJA225K016RNJ 2.2uF 16V  ±10% 6.5Ω 1206  SMD Tantalum Capacitor", Case Code (Imperial)=1206, Case Code (Metric)=3216, Dielectric Material=Tantalum, ESR (Equivalent Series Resistance)=6.5R, Leakage Current=500nA, Max Operating Temperature=125°C, Min Operating Temperature=-55°C, Package Quantity=1, Tolerance=10%, Voltage=16V, Capacitance=2.2uF, Case/Package=1206, Construction=Flat, Depth=1.6mm, Dissipation Factor=6%, Features="General Purpose", Height=1.6mm, Height - Seated (Max)=0.071inch, Lead Free="Lead Free", Length=3.2mm, Mount="Surface Mount", Number of Pins=2, packaging="Tape and Reel", Polarity=Polar, Q Factor=6, Radiation Hardening=No, REACH SVHC="No SVHC", RoHS Compliant=Yes, series=TAJ, Termination=SMD/SMT, Voltage Rating=16V, Voltage Rating (DC)=16V, Width=1.6mm
C19 C23: library part CL10B104KB8NNNC, "CAP CER 0.1UF 50V X7R 0603", Capacitance=30p, Device Package="0603 (1608 Metric)", manufacturer="Samsung Electro-Mechanics", Operating Temperature="-55°C ~ 125°C", Supplier Part Number 1=1276-1000-1-ND, Temperature Coefficient=X7R, Tolerance=±10%, Voltage - Rated=50V, Applications="General Purpose", componentlink1description=Datasheet, componentlink1url=http://www.samsungsem.com/kr/support/product-search/mlcc/CL10B104KB8NNNC.jsp, componentlink2description="DigiKey Link", componentlink2url=https://www.digikey.com/en/products/detail/samsung-electro-mechanics/CL10B104KB8NNNC/3886658, lastupdated="09/02/2024 20:10:20", Lifecycle Status=Active, Minimum Order=1, Mounting Type="Surface Mount, MLCC", Package / Case="0603 (1608 Metric)", packaging=TapeAndReel, Part Number=CL10B104KB8NNNC, Part Status=Active, partid=9788, price=0.01, series=CL, Size / Dimension="0.063\" L x 0.031\" W (1.60mm x 0.80mm)", Supplier 1=DigiKey, Thickness (Max)="0.035\" (0.90mm)"
C24 C27: library part CL21B225KAFNNNE, "CAP CER 2.2UF 25V X7R 0805", Capacitance=2µ2, Device Package="0805 (2012 Metric)", manufacturer="Samsung Electro-Mechanics", Operating Temperature="-55°C ~ 125°C", Supplier Part Number 1=1276-2954-1-ND, Temperature Coefficient=X7R, Tolerance=±10%, Voltage - Rated=25V, Applications="General Purpose", componentlink1description=Datasheet, componentlink1url=http://www.samsungsem.com/kr/support/product-search/mlcc/CL21B225KAFNNNE.jsp, componentlink2description="DigiKey Link", componentlink2url=https://www.digikey.com/en/products/detail/samsung-electro-mechanics/CL21B225KAFNNNE/3888612, lastupdated="09/02/2024 20:15:21", Lifecycle Status=Active, Minimum Order=1, Mounting Type="Surface Mount, MLCC", Package / Case="0805 (2012 Metric)", packaging=TapeAndReel, Part Number=CL21B225KAFNNNE, Part Status=Active, partid=17958, price=0.02, series=CL, Size / Dimension="0.079\" L x 0.049\" W (2.00mm x 1.25mm)", Supplier 1=DigiKey, Thickness (Max)="0.053\" (1.35mm)"
D1: library part SCHOTTKY, "Schottky diode"
D2 D5 D6: "Typical RED GaAs LED"
D3 D4: "Diode"
ESD_P1: library part CMP-2000-05378-1, "Very low capacitance ESD protection, 3.5 pF, -40 to 125 degC, 6-Pin SOT23, RoHS, Tape and Reel", Capacitance Value=3.5pF, Clamping Voltage=17V, Leakage Current=0.15uA, manufacturer=STMicroelectronics, Operating Temp Range=-40Cto125C, Operating Temperature Classification=Automotive, Operating Temperature Max Deg. C=125C, Operating Temperature Min Deg. C=-40C, Package / Case=SOT-23, Package Description="6-Pin Small Outline Transistor, Body 2.925 x 1.625 mm, Pitch 0.95 mm", Package Reference=SOT23-6L, Peak Pulse Current=5A, Reverse Breakdown Voltage=6V, Reverse Stand-off Voltage=5V, Test Current (It)=1mA, Clamping Voltage (Max)=17V, Configuration=Dual, Datasheet URL=http://www.st.com/st-web-ui/static/active/en/resource/technical/document/datasheet/CD00050750.pdf, Datasheet Version="Rev. 5, 10/2011", Direction Type=Uni-Directional, Leakage Current (Max)=0.15uA, Manufacturer URL=http://www.st.com/, Mounting=SurfaceMount, Mounting Style=SurfaceMount, Number of Elements=1, packaging=TapeandReel, Pin Count=6, Polarity=Uni-Directional, Product Depth (mm)=1.75mm, Product Height (mm)=1.3mm, Product Length (mm)=3.05mm, Rad Hardened=No, Suppressor Type=DiodeArrays, Working Voltage=5V, Working Voltage (Max)=5V
IC1 IC2: "Integrated Circuit", Manufacturer_Name=Microchip, Mouser Part Number=998-MIC5219-3.3YM5TR, Arrow Part Number=MIC5219-3.3YM5-TR, Arrow Price/Stock=https://www.arrow.com/en/products/mic5219-3.3ym5-tr/microchip-technology?region=europe, Datasheet Link=http://www.microchip.com/mymicrochip/filehandler.aspx?ddocname=en579712, Height=1.45mm, Manufacturer_Part_Number=MIC5219-3.3YM5-TR, Mouser Price/Stock=https://www.mouser.co.uk/ProductDetail/Microchip-Technology/MIC5219-3.3YM5-TR?qs=U6T8BxXiZAWojkIJMtSJlw%3D%3D
J1: "Connector", Manufacturer_Name=Amphenol, Mouser Part Number=649-202112100010C4LF, Datasheet Link=https://cdn.amphenol-cs.com/media/wysiwyg/files/drawing/20021121.pdf, Height=5.7mm, Manufacturer_Part_Number=20021121-00010C4LF, Mouser Price/Stock=https://www.mouser.co.uk/ProductDetail/Amphenol-FCI/20021121-00010C4LF?qs=iIVTEDlrHA1ddfCJGH4Nhg%3D%3D
L1: library part SRP5030T-100M, "FIXED IND 10UH 2.75A 128MOHM SMD", Current - Saturation=3.5A, Current Rating (Amps)="2.75 A", DC Resistance (DCR)="128mOhm Max", Device Package=Nonstandard, Inductance="10 µH", Inductance Frequency - Test="100 kHz", manufacturer="Bourns Inc.", Operating Temperature="-40°C ~ 125°C", Supplier Part Number 1=SRP5030T-100MCT-ND, Tolerance=±20%, componentlink1description=Datasheet, componentlink1url=https://www.bourns.com/docs/Product-Datasheets/SRP5030T.pdf, componentlink2description="DigiKey Link", componentlink2url=https://www.digikey.com/en/products/detail/bourns-inc/SRP5030T-100M/3986087, Height - Seated (Max)="0.118\" (3.00mm)", lastupdated="03/06/2024 20:02:35", Lifecycle Status=Active, Material - Core="Iron Powder", Minimum Order=1, Mounting Type="Surface Mount", Package / Case=Nonstandard, packaging=TapeAndReel, Part Number=SRP5030T-100M, Part Status=Active, partid=9, price=0.59, series=SRP5030T, Shielding=Shielded, Size / Dimension="0.224\" L x 0.205\" W (5.70mm x 5.20mm)", Supplier 1=DigiKey, Type="Drum Core, Wirewound"
OSC1: library part 3225-8.00-20-10-10/A, Equivalent Series Resistance(ESR)=500Ω, JLCPCB Part Class="Extended Part", LCSC Part Name="8MHz ±10ppm 20pF", manufacturer=LIMING(利明), Normal temperature Frequency Tolerance=±10ppm, Operating Temperature=-20℃~+70℃, Add into BOM=yes, Convert to PCB=yes, Datasheet=https://atta.szlcsc.com/upload/public/pdf/source/20200603/C518143_C28693AFC6B5677A46756E3C75F63174.pdf, Device=3225-8.00-20-10-10/A, Manufacturer Part=3225-8.00-20-10-10/A, Supplier=LCSC, Supplier Footprint=SMD3225-4P, Supplier Part=C518156, Symbol=3225-8.00-20-10-10/A, Type="Surface Mount Crystal"
OSC2: library part X322527MSB4SI
P1: library part CMP-2000-07082-1, "Male Header, Pitch 1 mm, 1 x 8 Position, Height 2.95 mm, -25 to 85 degC, RoHS, Tape and Reel", manufacturer=JST, Package Description="Male Header, Pitch 1 mm, 1 x 8 Position, Height 2.95 mm", Package Reference=SM08B-SRSS-TB, Datasheet URL=http://www.jst-mfg.com/product/pdf/eng/eSR.pdf, Datasheet Version=11/2010, Manufacturer URL=http://www.jst.com/home2.html, Mounting Technology=SurfaceMount, No of Positions=8, Pitch=1mm, Style/Orientation=RightAngleHeader/Plug, Termination=Crimp, Type=ShroudedHeader
P2 P4 P5: library part Connector_6pin, "6pin connector"
P3: library part Connector_4pin, "4pin Connector"
R1: library part RC0603FR-07511KL, "RES 511K OHM 1% 1/10W 0603", Device Package="0603 (1608 Metric)", manufacturer=Yageo, Operating Temperature="-55°C ~ 155°C", Power (Watts)="0.1W, 1/10W", Resistance="511 kOhms", Supplier Device Package=0603, Supplier Part Number 1=311-511KHRCT-ND, Temperature Coefficient=±100ppm/°C, Tolerance=±1%, componentlink1description=Datasheet, componentlink1url=https://www.yageo.com/upload/media/product/productsearch/datasheet/rchip/PYu-RC_Group_51_RoHS_L_10.pdf, componentlink2description="DigiKey Link", componentlink2url=https://www.digikey.com/en/products/detail/yageo/RC0603FR-07511KL/727288, Composition="Thick Film", Features="Moisture Resistant", Height - Seated (Max)="0.022\" (0.55mm)", lastupdated="25/07/2024 09:19:31", Lifecycle Status=Active, Minimum Order=1, Number of Terminations=2, Package / Case="0603 (1608 Metric)", packaging=CutTape, Part Number=RC0603FR-07511KL, Part Status=Active, partid=7757, price=0.01, series=RC_L, Size / Dimension="0.063\" L x 0.031\" W (1.60mm x 0.80mm)", Supplier 1=DigiKey
R2: library part RC0603FR-0749R9L, "RES 49.9 OHM 1% 1/10W 0603", Device Package="0603 (1608 Metric)", manufacturer=Yageo, Operating Temperature="-55°C ~ 155°C", Power (Watts)="0.1W, 1/10W", Resistance="49.9 Ohms", Supplier Device Package=0603, Supplier Part Number 1=311-49.9HRCT-ND, Temperature Coefficient=±100ppm/°C, Tolerance=±1%, componentlink1description=Datasheet, componentlink1url=https://www.yageo.com/upload/media/product/productsearch/datasheet/rchip/PYu-RC_Group_51_RoHS_L_10.pdf, componentlink2description="DigiKey Link", componentlink2url=https://www.digikey.com/en/products/detail/yageo/RC0603FR-0749R9L/727264, Composition="Thick Film", Features="Moisture Resistant", Height - Seated (Max)="0.022\" (0.55mm)", lastupdated="25/07/2024 09:19:17", Lifecycle Status=Active, Minimum Order=1, Number of Terminations=2, Package / Case="0603 (1608 Metric)", packaging=CutTape, Part Number=RC0603FR-0749R9L, Part Status=Active, partid=23951, price=0.01, series=RC_L, Size / Dimension="0.063\" L x 0.031\" W (1.60mm x 0.80mm)", Supplier 1=DigiKey
R3 R10: library part RC0603FR-07100KL, "RES 100K OHM 1% 1/10W 0603", Device Package="0603 (1608 Metric)", manufacturer=Yageo, Operating Temperature="-55°C ~ 155°C", Power (Watts)="0.1W, 1/10W", Resistance="100 kOhms", Supplier Device Package=0603, Supplier Part Number 1=311-100KHRCT-ND, Temperature Coefficient=±100ppm/°C, Tolerance=±1%, componentlink1description=Datasheet, componentlink1url=https://www.yageo.com/upload/media/product/productsearch/datasheet/rchip/PYu-RC_Group_51_RoHS_L_10.pdf, componentlink2description="DigiKey Link", componentlink2url=https://www.digikey.com/en/products/detail/yageo/RC0603FR-07100KL/726889, Composition="Thick Film", Features="Moisture Resistant", Height - Seated (Max)="0.022\" (0.55mm)", lastupdated="25/07/2024 09:19:17", Lifecycle Status=Active, Minimum Order=1, Number of Terminations=2, Package / Case="0603 (1608 Metric)", packaging=CutTape, Part Number=RC0603FR-07100KL, Part Status=Active, partid=23948, price=0.01, series=RC_L, Size / Dimension="0.063\" L x 0.031\" W (1.60mm x 0.80mm)", Supplier 1=DigiKey
R4: library part RC0603FR-07105KL, "RES 105K OHM 1% 1/10W 0603", Device Package="0603 (1608 Metric)", manufacturer=Yageo, Operating Temperature="-55°C ~ 155°C", Power (Watts)="0.1W, 1/10W", Resistance="105 kOhms", Supplier Device Package=0603, Supplier Part Number 1=311-105KHRCT-ND, Temperature Coefficient=±100ppm/°C, Tolerance=±1%, componentlink1description=Datasheet, componentlink1url=https://www.yageo.com/upload/media/product/productsearch/datasheet/rchip/PYu-RC_Group_51_RoHS_L_10.pdf, componentlink2description="DigiKey Link", componentlink2url=https://www.digikey.com/en/products/detail/yageo/RC0603FR-07105KL/726893, Composition="Thick Film", Features="Moisture Resistant", Height - Seated (Max)="0.022\" (0.55mm)", lastupdated="25/07/2024 09:19:32", Lifecycle Status=Active, Minimum Order=1, Number of Terminations=2, Package / Case="0603 (1608 Metric)", packaging=CutTape, Part Number=RC0603FR-07105KL, Part Status=Active, partid=7511, price=0.01, series=RC_L, Size / Dimension="0.063\" L x 0.031\" W (1.60mm x 0.80mm)", Supplier 1=DigiKey
R5: library part RC0603FR-0713K3L, "RES 13.3K OHM 1% 1/10W 0603", Device Package="0603 (1608 Metric)", manufacturer=Yageo, Operating Temperature="-55°C ~ 155°C", Power (Watts)="0.1W, 1/10W", Resistance="13.3 kOhms", Supplier Device Package=0603, Supplier Part Number 1=311-13.3KHRCT-ND, Temperature Coefficient=±100ppm/°C, Tolerance=±1%, componentlink1description=Datasheet, componentlink1url=https://www.yageo.com/upload/media/product/productsearch/datasheet/rchip/PYu-RC_Group_51_RoHS_L_10.pdf, componentlink2description="DigiKey Link", componentlink2url=https://www.digikey.com/en/products/detail/yageo/RC0603FR-0713K3L/726931, Composition="Thick Film", Features="Moisture Resistant", Height - Seated (Max)="0.022\" (0.55mm)", lastupdated="25/07/2024 09:19:28", Lifecycle Status=Active, Minimum Order=1, Number of Terminations=2, Package / Case="0603 (1608 Metric)", packaging=CutTape, Part Number=RC0603FR-0713K3L, Part Status=Active, partid=12236, price=0.01, series=RC_L, Size / Dimension="0.063\" L x 0.031\" W (1.60mm x 0.80mm)", Supplier 1=DigiKey
R7: library part RC0603FR-0733KL, "RES 33K OHM 1% 1/10W 0603", Device Package="0603 (1608 Metric)", manufacturer=Yageo, Operating Temperature="-55°C ~ 155°C", Power (Watts)="0.1W, 1/10W", Resistance="33 kOhms", Supplier Device Package=0603, Supplier Part Number 1=311-33.0KHRCT-ND, Temperature Coefficient=±100ppm/°C, Tolerance=±1%, componentlink1description=Datasheet, componentlink1url=https://www.yageo.com/upload/media/product/productsearch/datasheet/rchip/PYu-RC_Group_51_RoHS_L_10.pdf, componentlink2description="DigiKey Link", componentlink2url=https://www.digikey.com/en/products/detail/yageo/RC0603FR-0733KL/727159, Composition="Thick Film", Features="Moisture Resistant", Height - Seated (Max)="0.022\" (0.55mm)", lastupdated="25/07/2024 09:19:21", Lifecycle Status=Active, Minimum Order=1, Number of Terminations=2, Package / Case="0603 (1608 Metric)", packaging=CutTape, Part Number=RC0603FR-0733KL, Part Status=Active, partid=18943, price=0.01, series=RC_L, Size / Dimension="0.063\" L x 0.031\" W (1.60mm x 0.80mm)", Supplier 1=DigiKey
R8: library part RC0603FR-0782KL, "RES 82K OHM 1% 1/10W 0603", Device Package="0603 (1608 Metric)", manufacturer=Yageo, Operating Temperature="-55°C ~ 155°C", Power (Watts)="0.1W, 1/10W", Resistance="82 kOhms", Supplier Device Package=0603, Supplier Part Number 1=311-82.0KHRCT-ND, Temperature Coefficient=±100ppm/°C, Tolerance=±1%, componentlink1description=Datasheet, componentlink1url=https://www.yageo.com/upload/media/product/productsearch/datasheet/rchip/PYu-RC_Group_51_RoHS_L_10.pdf, componentlink2description="DigiKey Link", componentlink2url=https://www.digikey.com/en/products/detail/yageo/RC0603FR-0782KL/727400, Composition="Thick Film", Features="Moisture Resistant", Height - Seated (Max)="0.022\" (0.55mm)", lastupdated="25/07/2024 09:19:21", Lifecycle Status=Active, Minimum Order=1, Number of Terminations=2, Package / Case="0603 (1608 Metric)", packaging=CutTape, Part Number=RC0603FR-0782KL, Part Status=Active, partid=19081, price=0.01, series=RC_L, Size / Dimension="0.063\" L x 0.031\" W (1.60mm x 0.80mm)", Supplier 1=DigiKey
R9 R12 R14 R19 R20 R21: library part RC0603FR-071KL, "RES 1K OHM 1% 1/10W 0603", Device Package="0603 (1608 Metric)", manufacturer=Yageo, Operating Temperature="-55°C ~ 155°C", Power (Watts)="0.1W, 1/10W", Resistance="1 kOhms", Supplier Device Package=0603, Supplier Part Number 1=311-1.00KHRCT-ND, Temperature Coefficient=±100ppm/°C, Tolerance=±1%, componentlink1description=Datasheet, componentlink1url=https://www.yageo.com/upload/media/product/productsearch/datasheet/rchip/PYu-RC_Group_51_RoHS_L_10.pdf, componentlink2description="DigiKey Link", componentlink2url=https://www.digikey.com/en/products/detail/yageo/RC0603FR-071KL/726843, Composition="Thick Film", Features="Moisture Resistant", Height - Seated (Max)="0.022\" (0.55mm)", lastupdated="25/07/2024 09:19:19", Lifecycle Status=Active, Minimum Order=1, Number of Terminations=2, Package / Case="0603 (1608 Metric)", packaging=CutTape, Part Number=RC0603FR-071KL, Part Status=Active, partid=22600, price=0.01, series=RC_L, Size / Dimension="0.063\" L x 0.031\" W (1.60mm x 0.80mm)", Supplier 1=DigiKey
R11 R13: library part RC0603FR-0710KL, "RES 10K OHM 1% 1/10W 0603", Device Package="0603 (1608 Metric)", manufacturer=Yageo, Operating Temperature="-55°C ~ 155°C", Power (Watts)="0.1W, 1/10W", Resistance="10 kOhms", Supplier Device Package=0603, Supplier Part Number 1=311-10.0KHRCT-ND, Temperature Coefficient=±100ppm/°C, Tolerance=±1%, componentlink1description=Datasheet, componentlink1url=https://www.yageo.com/upload/media/product/productsearch/datasheet/rchip/PYu-RC_Group_51_RoHS_L_10.pdf, componentlink2description="DigiKey Link", componentlink2url=https://www.digikey.com/en/products/detail/yageo/RC0603FR-0710KL/726880, Composition="Thick Film", Features="Moisture Resistant", Height - Seated (Max)="0.022\" (0.55mm)", lastupdated="25/07/2024 09:19:19", Lifecycle Status=Active, Minimum Order=1, Number of Terminations=2, Package / Case="0603 (1608 Metric)", packaging=CutTape, Part Number=RC0603FR-0710KL, Part Status=Active, partid=22599, price=0.01, series=RC_L, Size / Dimension="0.063\" L x 0.031\" W (1.60mm x 0.80mm)", Supplier 1=DigiKey
R15 R16 R22 R23: library part RC0603FR-075K1L, "RES 5.1K OHM 1% 1/10W 0603", Device Package="0603 (1608 Metric)", manufacturer=Yageo, Operating Temperature="-55°C ~ 155°C", Power (Watts)="0.1W, 1/10W", Resistance="5.1 kOhms", Supplier Device Package=0603, Supplier Part Number 1=311-5.10KHRCT-ND, Temperature Coefficient=±100ppm/°C, Tolerance=±1%, componentlink1description=Datasheet, componentlink1url=https://www.yageo.com/upload/media/product/productsearch/datasheet/rchip/PYu-RC_Group_51_RoHS_L_10.pdf, componentlink2description="DigiKey Link", componentlink2url=https://www.digikey.com/en/products/detail/yageo/RC0603FR-075K1L/727268, Composition="Thick Film", Features="Moisture Resistant", Height - Seated (Max)="0.022\" (0.55mm)", lastupdated="25/07/2024 09:19:21", Lifecycle Status=Active, Minimum Order=1, Number of Terminations=2, Package / Case="0603 (1608 Metric)", packaging=CutTape, Part Number=RC0603FR-075K1L, Part Status=Active, partid=18982, price=0.01, series=RC_L, Size / Dimension="0.063\" L x 0.031\" W (1.60mm x 0.80mm)", Supplier 1=DigiKey
R17 R18: library part RC0603FR-0775RL, "RES 75 OHM 1% 1/10W 0603", Device Package="0603 (1608 Metric)", manufacturer=Yageo, Operating Temperature="-55°C ~ 155°C", Power (Watts)="0.1W, 1/10W", Resistance="75 Ohms", Supplier Device Package=0603, Supplier Part Number 1=311-75.0HRCT-ND, Temperature Coefficient=±100ppm/°C, Tolerance=±1%, componentlink1description=Datasheet, componentlink1url=https://www.yageo.com/upload/media/product/productsearch/datasheet/rchip/PYu-RC_Group_51_RoHS_L_10.pdf, componentlink2description="DigiKey Link", componentlink2url=https://www.digikey.com/en/products/detail/yageo/RC0603FR-0775RL/727377, Composition="Thick Film", Features="Moisture Resistant", Height - Seated (Max)="0.022\" (0.55mm)", lastupdated="25/07/2024 09:19:21", Lifecycle Status=Active, Minimum Order=1, Number of Terminations=2, Package / Case="0603 (1608 Metric)", packaging=CutTape, Part Number=RC0603FR-0775RL, Part Status=Active, partid=18934, price=0.01, series=RC_L, Size / Dimension="0.063\" L x 0.031\" W (1.60mm x 0.80mm)", Supplier 1=DigiKey
S1: "Switch"
U1: library part CMP-0243-00019-3, "ARM Cortex-M4 32-bit MCU+FPU, 210 DMIPS, 1024 kB Flash, 192 kB Internal RAM, 51 I/Os, 64-pin LQFP, -40 to 85 degC, Tray", I/Os (High Current)=51, manufacturer=STMicroelectronics, Operating Frequency(F) (Processor speed) (MHz)=168, Supply Voltage(Vcc) max (V)=3.6, Supply Voltage(Vcc) min (V)=1.8, componentlink1description="Manufacturer URL", componentlink1url=http://www.st.com/web/en/home.html, componentlink2description=Datasheet, componentlink2url=http://www.st.com/st-web-ui/static/active/en/resource/technical/document/datasheet/DM00037051.pdf, ComponentLink3Description="Package Specification", ComponentLink3URL=http://www.st.com/st-web-ui/static/active/en/resource/technical/document/datasheet/DM00037051.pdf, Core="ARM Cortex-M4", D/A Converter=2x12-bit, DatasheetVersion="Rev. 4", FLASH Size (Prog) (kB)=1024, Internal RAM Size (kB)=192, Mounting Technology="Surface Mount", PackageDescription="64-Pin Low Profile Quad Flat Package, 10 x 10 mm Body, 0.5 mm Pitch", PackageReference=LQFP64, PackageVersion="Rev. 4, 06/2013", Packing=Tray, PartNumber=STM32F405RGT6
U2: "IC REG BUCK ADJ 3A TSOT23-6", Current - Output=3A, Device Package="SOT-23-6 Thin, TSOT-23-6", Frequency - Switching=400kHz, manufacturer="Texas Instruments", Operating Temperature="-40°C ~ 125°C (TJ)", Supplier Device Package=TSOT-23-6, Supplier Part Number 1=296-44542-1-ND, Voltage - Input (Max)=28V, Voltage - Input (Min)=4.5V, Voltage - Output (Min/Fixed)=0.596V, componentlink1description=Datasheet, componentlink1url=http://www.ti.com/general/docs/suppproductinfo.tsp?distId=10&gotoUrl=http%3A%2F%2Fwww.ti.com%2Flit%2Fgpn%2Ftps54302, componentlink2description="DigiKey Link", componentlink2url=http://digikey.com/product-detail/en/texas-instruments/TPS54302DDCT/296-44542-1-ND/6128450, Function=Step-Down, lastupdated="04/02/2020 14:31:43", Lifecycle Status=Active, Minimum Order=1, Mounting Type="Surface Mount", Number of Outputs=1, Output Configuration=Positive, Output Type=Adjustable, Package / Case="SOT-23-6 Thin, TSOT-23-6", packaging=TapeAndReel, Part Number=TPS54302DDCT, Part Status=Active, price=1.06, series=-, Supplier 1=DigiKey, Synchronous Rectifier=Yes, Topology=Buck, Voltage - Output (Max)=28V
U3: "Integrated Circuit", Manufacturer_Name=TDK, Mouser Part Number=410-ICM-42688-P, Arrow Part Number=ICM-42688-P, Arrow Price/Stock=https://www.arrow.com/en/products/icm-42688-p/invensense?utm_currency=USD&region=nac, Datasheet Link=https://3cfeqx1hf82y3xcoull08ihx-wpengine.netdna-ssl.com/wp-content/uploads/2021/06/DS-000347-ICM-42688-P-v1.5.pdf, Manufacturer_Part_Number=ICM-42688-P, Mouser Price/Stock=https://www.mouser.co.uk/ProductDetail/TDK-InvenSense/ICM-42688-P?qs=OlC7AqGiEDk8QrNAV728zw%3D%3D
U4: "P-Sensor SPI I2C 1, 25 Bar SMD", Package=None, Availability=Unavailable, MP=BMP388, price=None
U5: "Integrated Circuit", Manufacturer_Name=ICOF, Datasheet Link=https://datasheet.lcsc.com/szlcsc/ZHONGKEWEI-AT7456E_C82351.pdf, Height=1.2mm, Manufacturer_Part_Number=AT7456E

## Free pads (board coordinates)
  round 4.5 hole 4: 1(19,44) 2(19,13.5) 3(49.5,13.5) 4(49.5,44)
  rect 1.5x2 smd far side: 6(25.36,45.25) 6(27.9,45.25) 6(30.44,45.25) 6(32.98,45.25) 6(35.52,45.25) 6(38.06,45.25) 6(40.6,45.25) 6(43.14,45.25)

## Via types
v1: diameter 0.45, hole 0.3, Top Layer to Bottom Layer, tented both sides, 44 vias
v2: diameter 0.55, hole 0.3, Top Layer to Bottom Layer, tented both sides, 25 vias
v3: diameter 0.55, hole 0.3, Top Layer to Power, tented both sides, 21 vias
v4: diameter 0.55, hole 0.3, Power to Bottom Layer, tented both sides, 18 vias
v5: diameter 0.55, hole 0.3, Top Layer to Bottom Layer, tented top, 2 vias
v6: diameter 0.55, hole 0.3, Top Layer to GND, tented both sides, 1 vias
v7: diameter 0.45, hole 0.3, Top Layer to GND, tented both sides, 1 vias
v8: diameter 0.55/0.55/0.55/0.55 (per signal layer), hole 0.3, Top Layer to Bottom Layer, tented both sides, 1 vias

## Nets (pads, with @x,y where several pads share a name; then routed paths per layer and width w, separated by ;. In a path a pad name is that pad's centre, name@x,y a point inside that pad or via, vN(x,y) a via of type N, cw(c..) or ccw(c..) an arc to the next point about the centre after c; other vN are vias at no path point)
+3V3: C1.2 C2.2 C3.2 C4.2 C5.2 C6.2 C7.2 C18.2 C20.1 C21.1 D2.A IC1.5 J1.1 R22.1 R23.1 S1.3 U1.1 U1.13 U1.19 U1.32 U1.48 U1.64 U4.1 U4.10 | length 36.3
  Top Layer w0.15: C4.2@24.578,26.325 25.394,26.325 25.569,26.5 U1.13@26.9,26.5 ; U1.1@26.9,32.5 28.392,32.5 28.592,32.7 v3(28.7,32.7) 28.725,32.725 28.725,34.325 U1.64@28.75,34.35 ; C6.2@29.75,20.975 U1.19@29.75,23.15 ; U1.32@36.25,23.15 36.279,23.121 36.279,22.146 C7.2@37.45,20.975 ; U1.48@38.1,32.5 38.181,32.5 38.25,32.569 C5.2@38.25,33.825 ; v3(40.38,22.596) 40.691,22.285 40.995,22.285 U4.1@41.03,22.25 41.08,22.2 42.375,22.2 C21.1@42.75,21.825 ; U4.10@40.765,21.72 40.765,20.7 C20.1@40.94,20.525 ; U4.10@40.765,21.735 40.855,21.825 40.855,22.156 ; U4.1@40.894,22.156 U4.1@40.984,22.156
  Top Layer w0.35: S1.3@19.95,28.648 20.125,28.823 20.807,28.823 21.139,29.155 v3(21.193,29.155) ; v3(44.4,39.6) 44.438,39.638 44.626,39.638 45.188,40.2 J1.1@46.008,40.2
  Top Layer w0.4: R22.1@45.15,13.898 45.15,16.109 45.3,16.259 v3(45.3,16.3) ; D2.A@48.723,21.653 v3(48.723,22.7)
  Top Layer w0.45: C1.2@23.85,33.9 24.157,34.207 25.357,34.207 C3.2@25.475,34.325 25.525,34.325 26.081,33.769 26.081,33.319 v3(26.1,33.3) ; C4.2@24.578,26.325 24.628,26.325 25.287,26.984 25.329,26.984 25.348,27.003 v3(25.375,27.003) ; C3.2@25.725,34.325 C2.2@27,34.325 ; C6.2@29.75,20.975 29.975,20.75 30.323,20.75 30.773,20.3 v3(30.8,20.3) ; C7.2@37.5,20.975 v3(37.5,22) ; v3(37.7,33.1) 37.719,33.119 37.719,33.344 38.2,33.825 C5.2@38.25,33.825
  Top Layer w0.5: v3(26.1,33.3) v3@26.1,33.314
  Bottom Layer w0.3: C18.2@37.7,33.15 C18.2@38.25,33.7 38.05,33.7 37.35,33 37.35,32.15 IC1.5@37.2,32 37.214,32.014 v4(38.114,32.014)
+3V3_IMU: C14.1 C15.1 C26.2 D5.A IC2.5 U3.5 U3.8 | length 7.7
  Top Layer w0.15: v3(41.15,35.9) 41.212,35.961 41.212,36.539 U3.5@41.273,36.6 ; U3.8@42.923,36.75 42.923,36.285 43.1,36.108 v3(43.1,36)
  Top Layer w0.4: D5.A@50.277,21.653 v3(50.277,22.7)
  Top Layer w0.45: v3(41.15,35.9) 41.15,35.873 41.225,35.798 41.225,35.4 41.275,35.4 C15.1@41.5,35.175 ; C14.1@42.9,35.175 43.081,35.356 43.081,35.981 v3(43.1,36)
  Bottom Layer w0.3: IC2.5@41.2,32 41.35,32.15 41.35,33 C26.2@42.05,33.7
  Bottom Layer w0.5: C26.2@42.05,33.7 42.1,33.75 v4(42.1,34.9)
+5V: D3.2 D4.2 IC1.1 IC1.3 IC2.1 IC2.3 | length 10.4
  Bottom Layer w0.3: IC1.3@35.3,29.5 35.406,29.606 35.406,30.33 35.775,30.699 36.199,30.699 36.874,30.7 37.2,30.374 IC1.1@37.2,29.5 ; D4.2@38.665,27.25 38.665,27.29 39.3,27.925 ; IC2.3@39.3,29.5 39.3,27.925 ; IC2.1@41.2,29.5 41.05,29.35 41.05,28.831 40.443,28.224 39.971,28.224 39.875,28.128 39.503,28.128 39.3,27.925
  Bottom Layer w0.4: v4(28.35,24.724) 28.379,24.753 28.482,24.753 29.213,25.484 D3.2@29.213,25.524
  other v4: 39.923,28.176 36.2,30.7